# Altium PCB Y001_Artix7_USB3.0_D0.PcbDoc (part 1 of 2)
Units mil, origin at the board's own origin, x right, y up, seen from the top; angles counter-clockwise.
Board outline 4724.41 x 3149.61 mil, 8 copper layers (Top Layer, DGND, SIGNAL1, POWER, SIGNAL2, SIGNAL3, VCC3V3, Bottom Layer); 323 components, 271 nets, 1472 pads, 570 vias.
Unrouted connection lines stored in the file: 778.
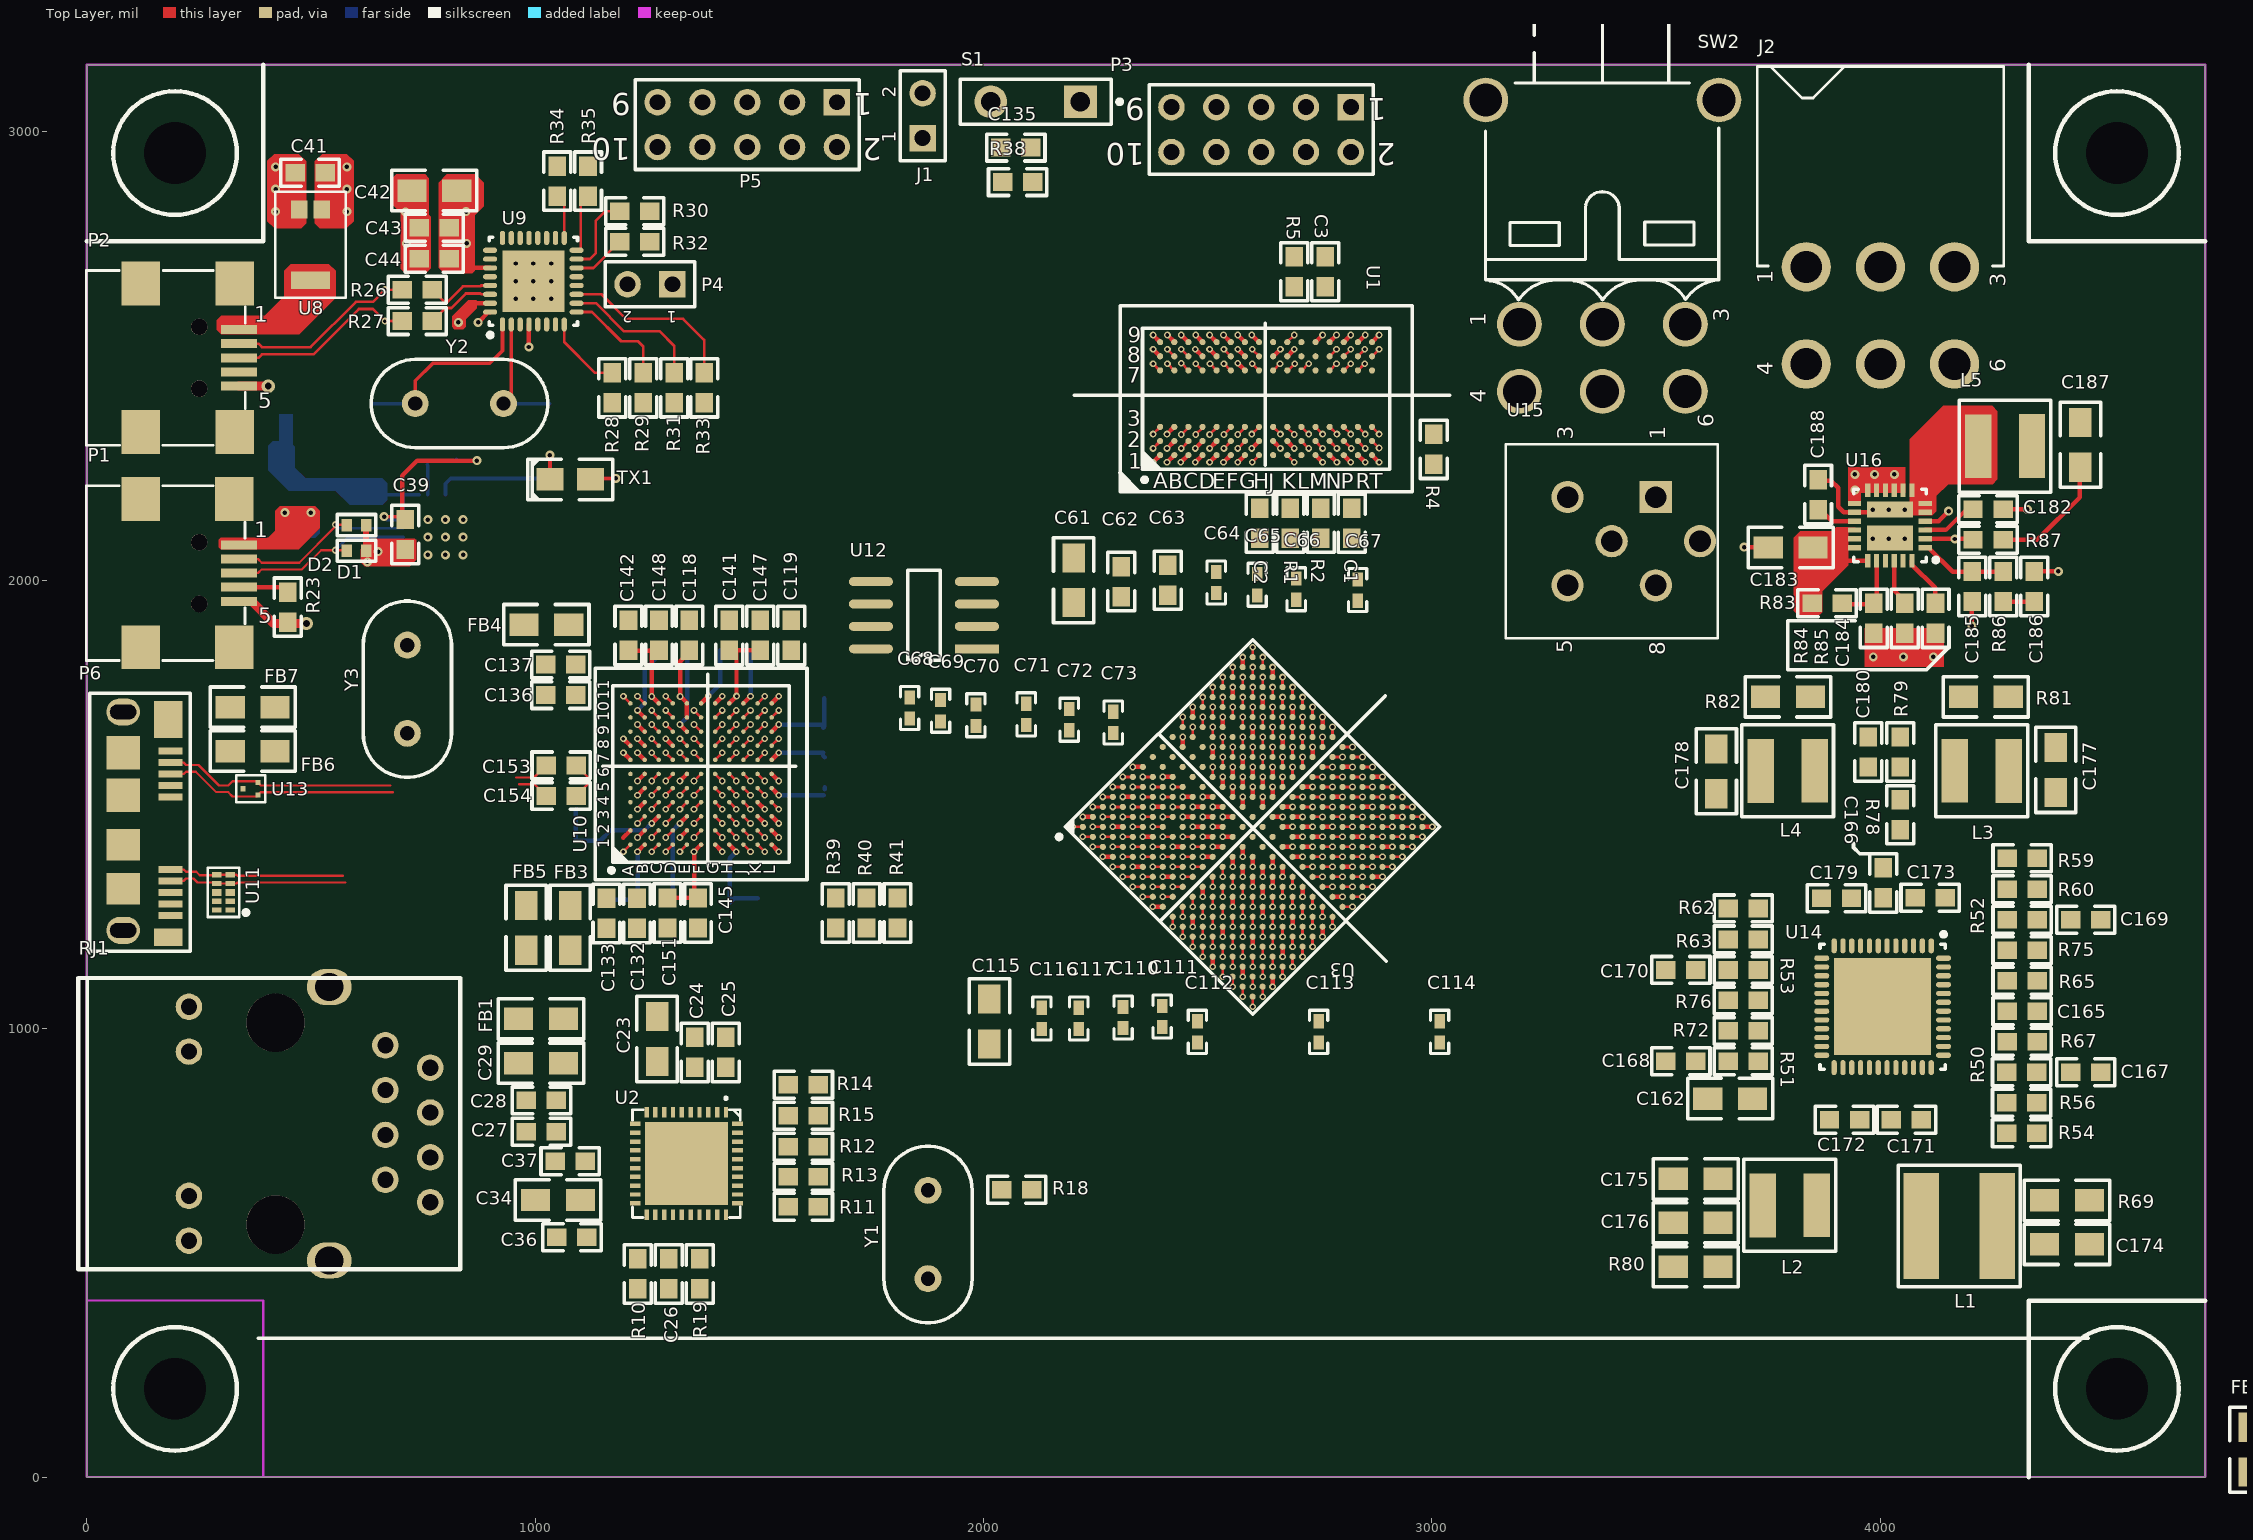
[diagram p0: Top Layer view]
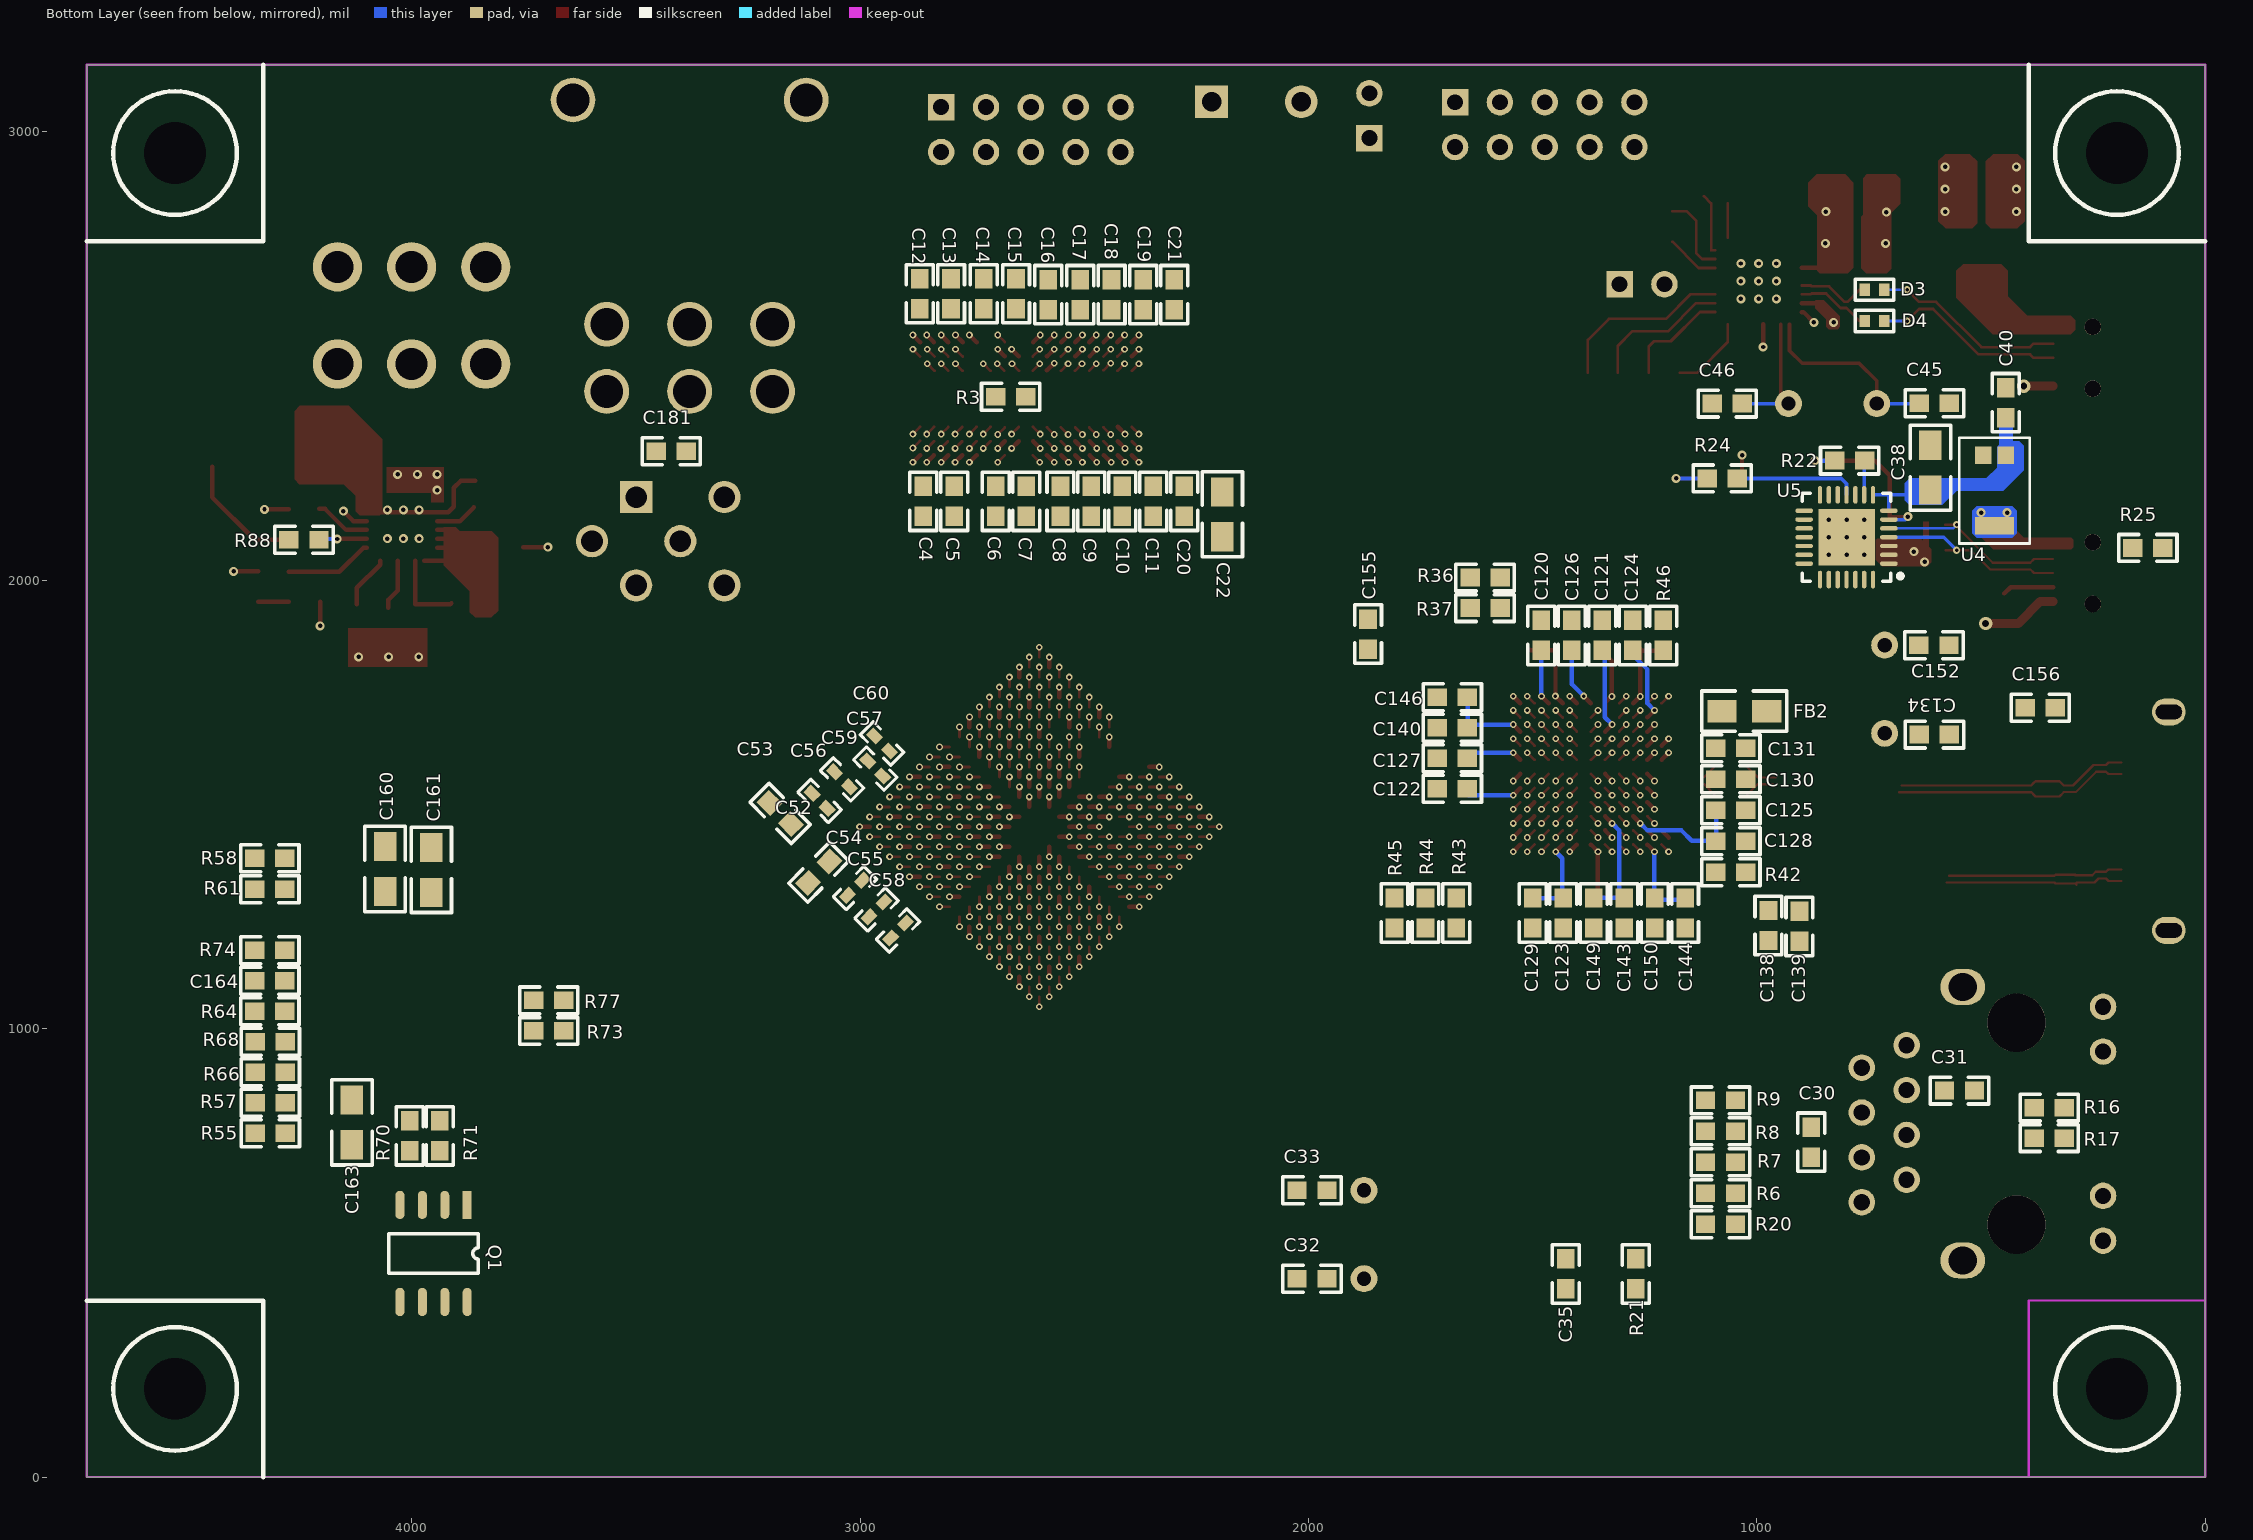
[diagram p1: Bottom Layer view, seen from below]
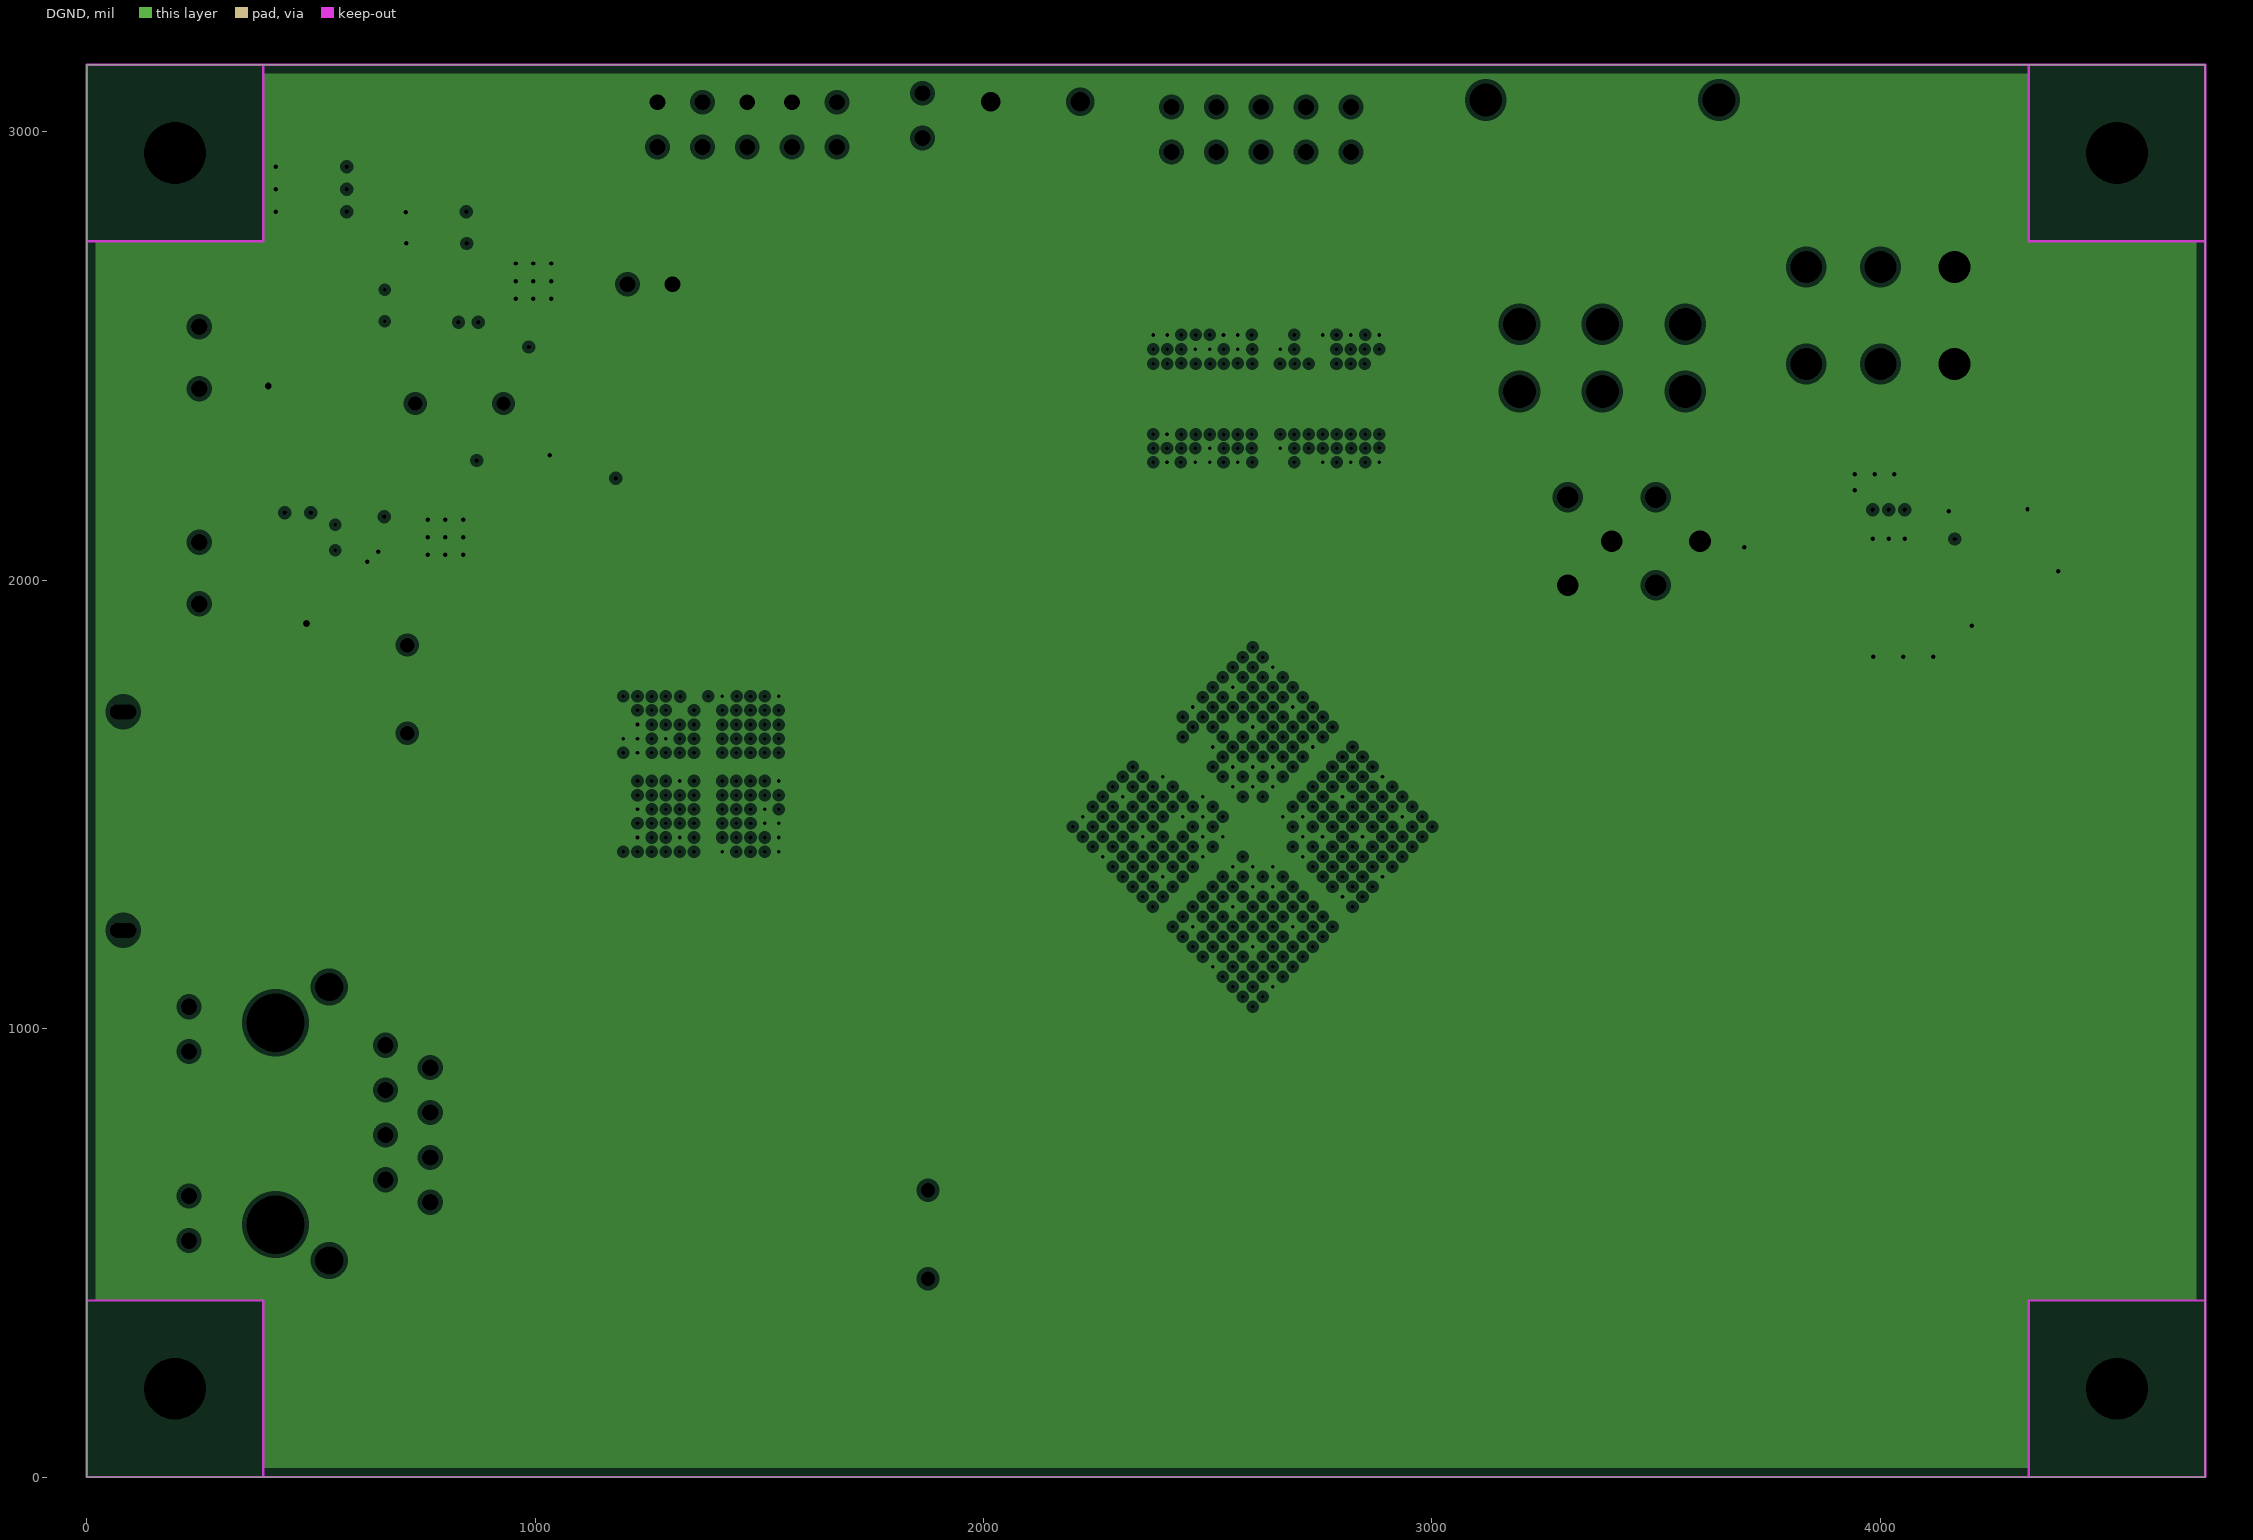
[diagram p2: DGND, clearances drawn from the general rule]
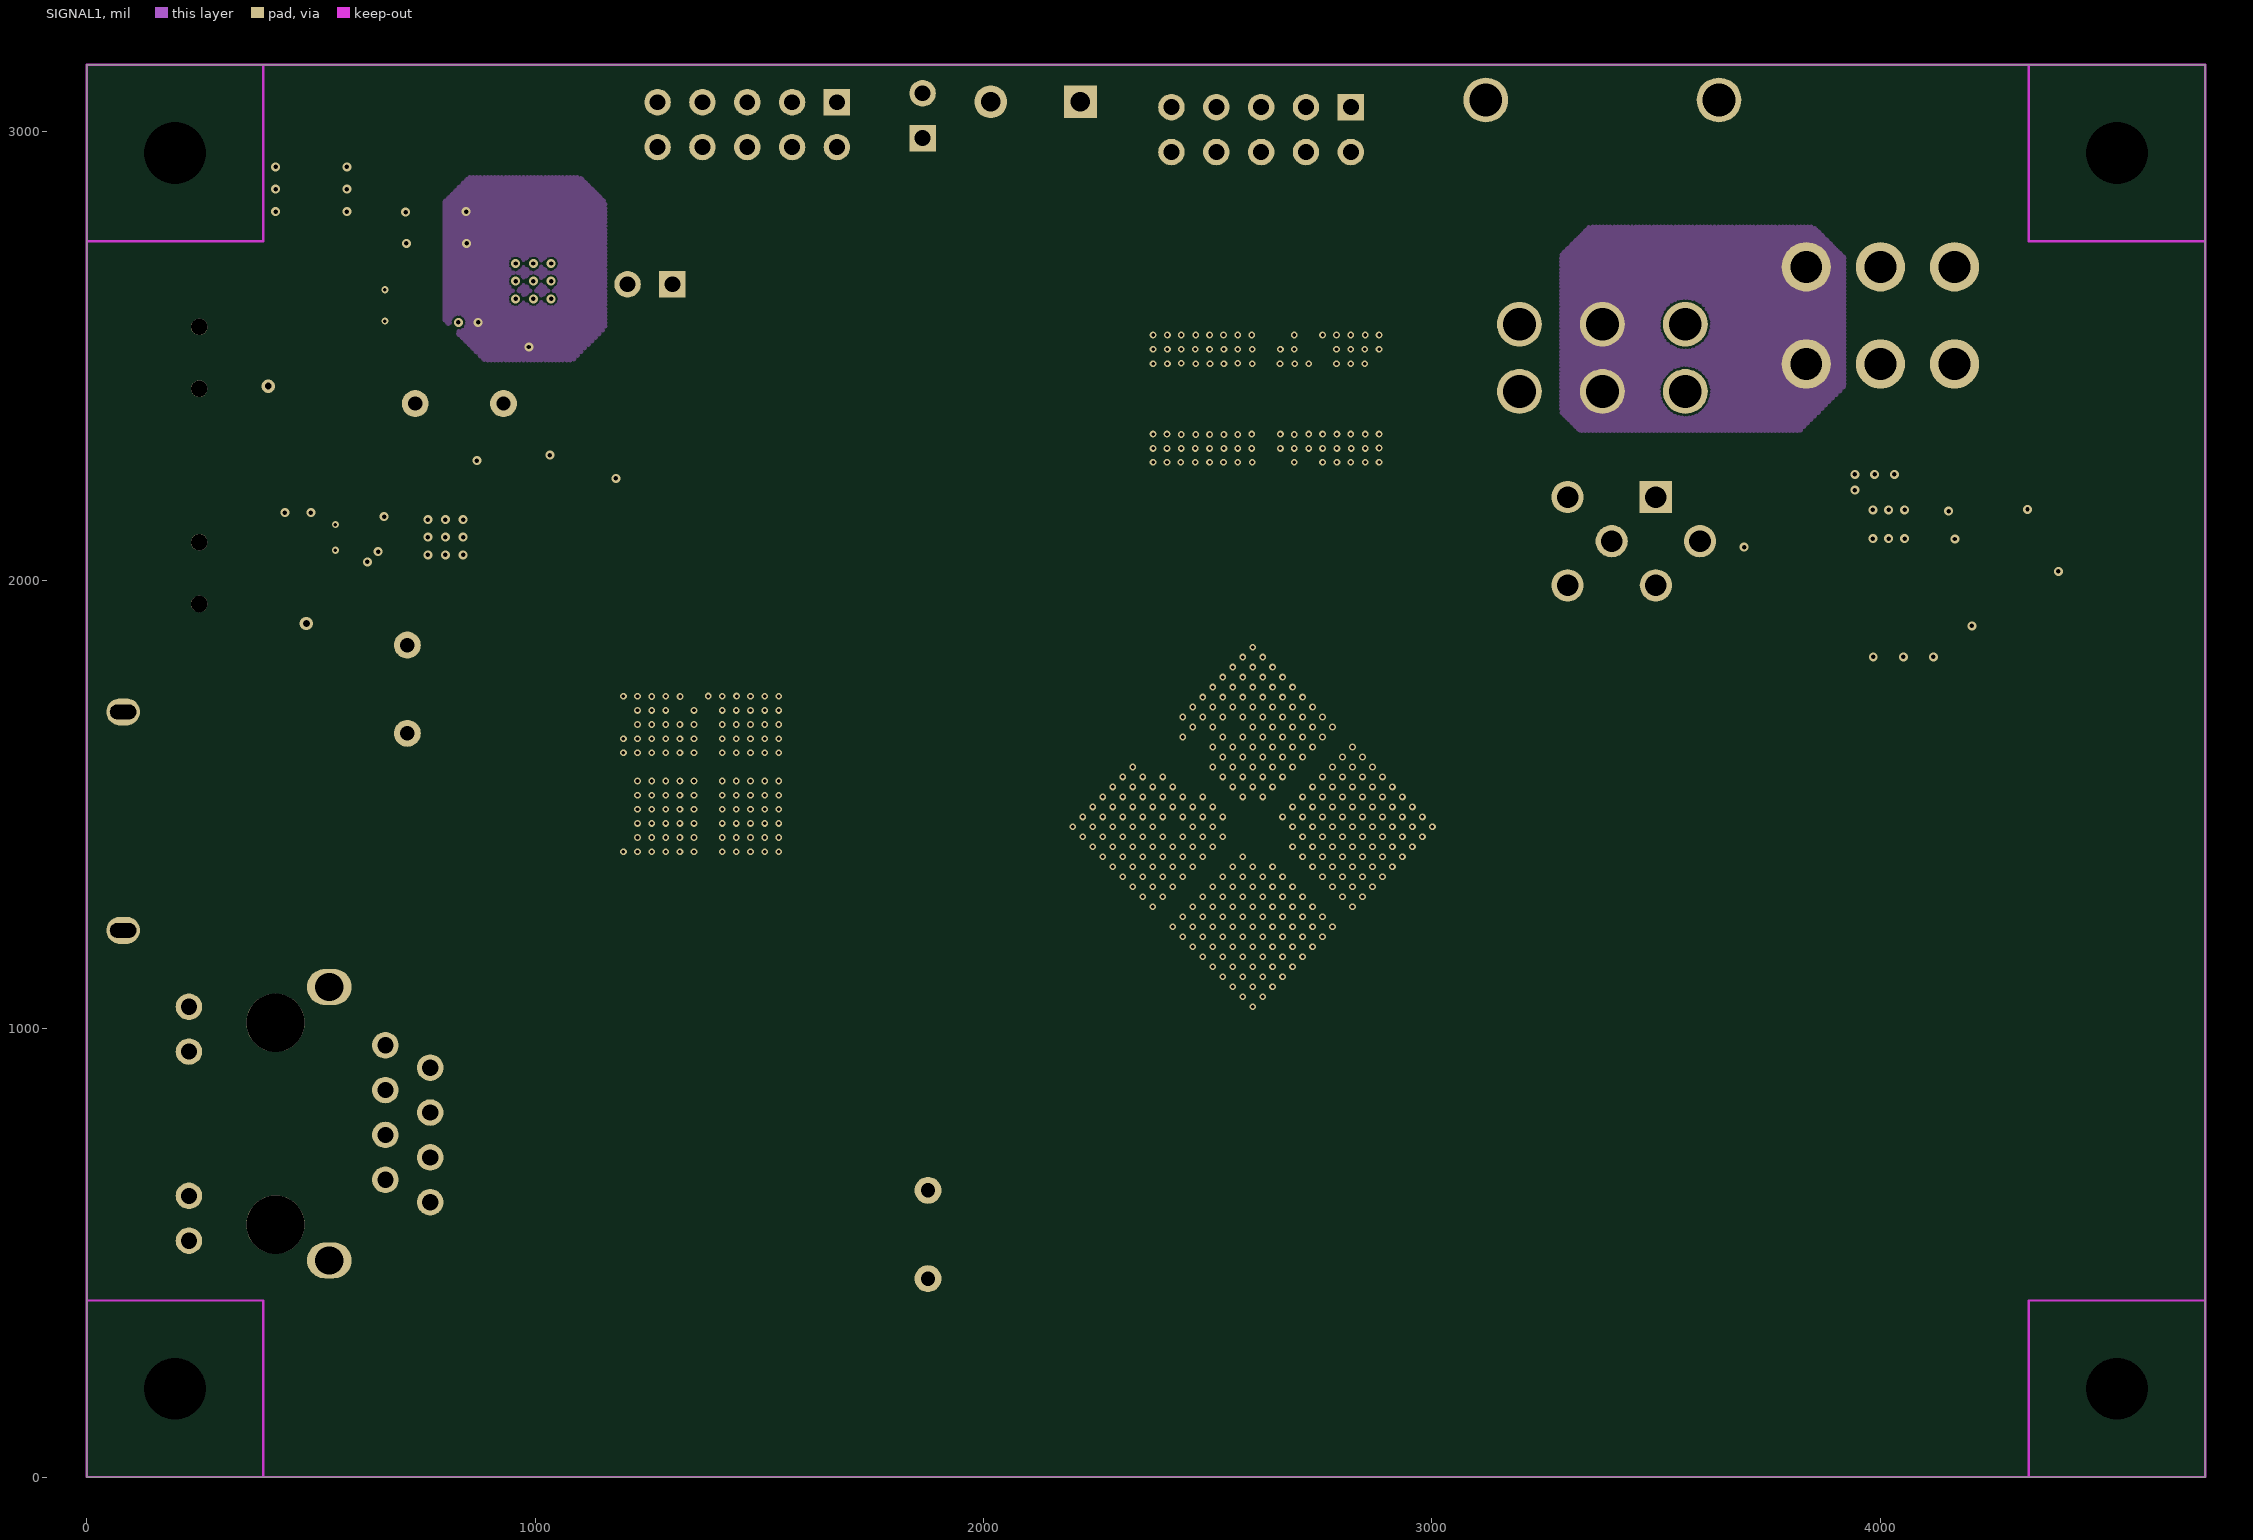
[diagram p3: SIGNAL1]
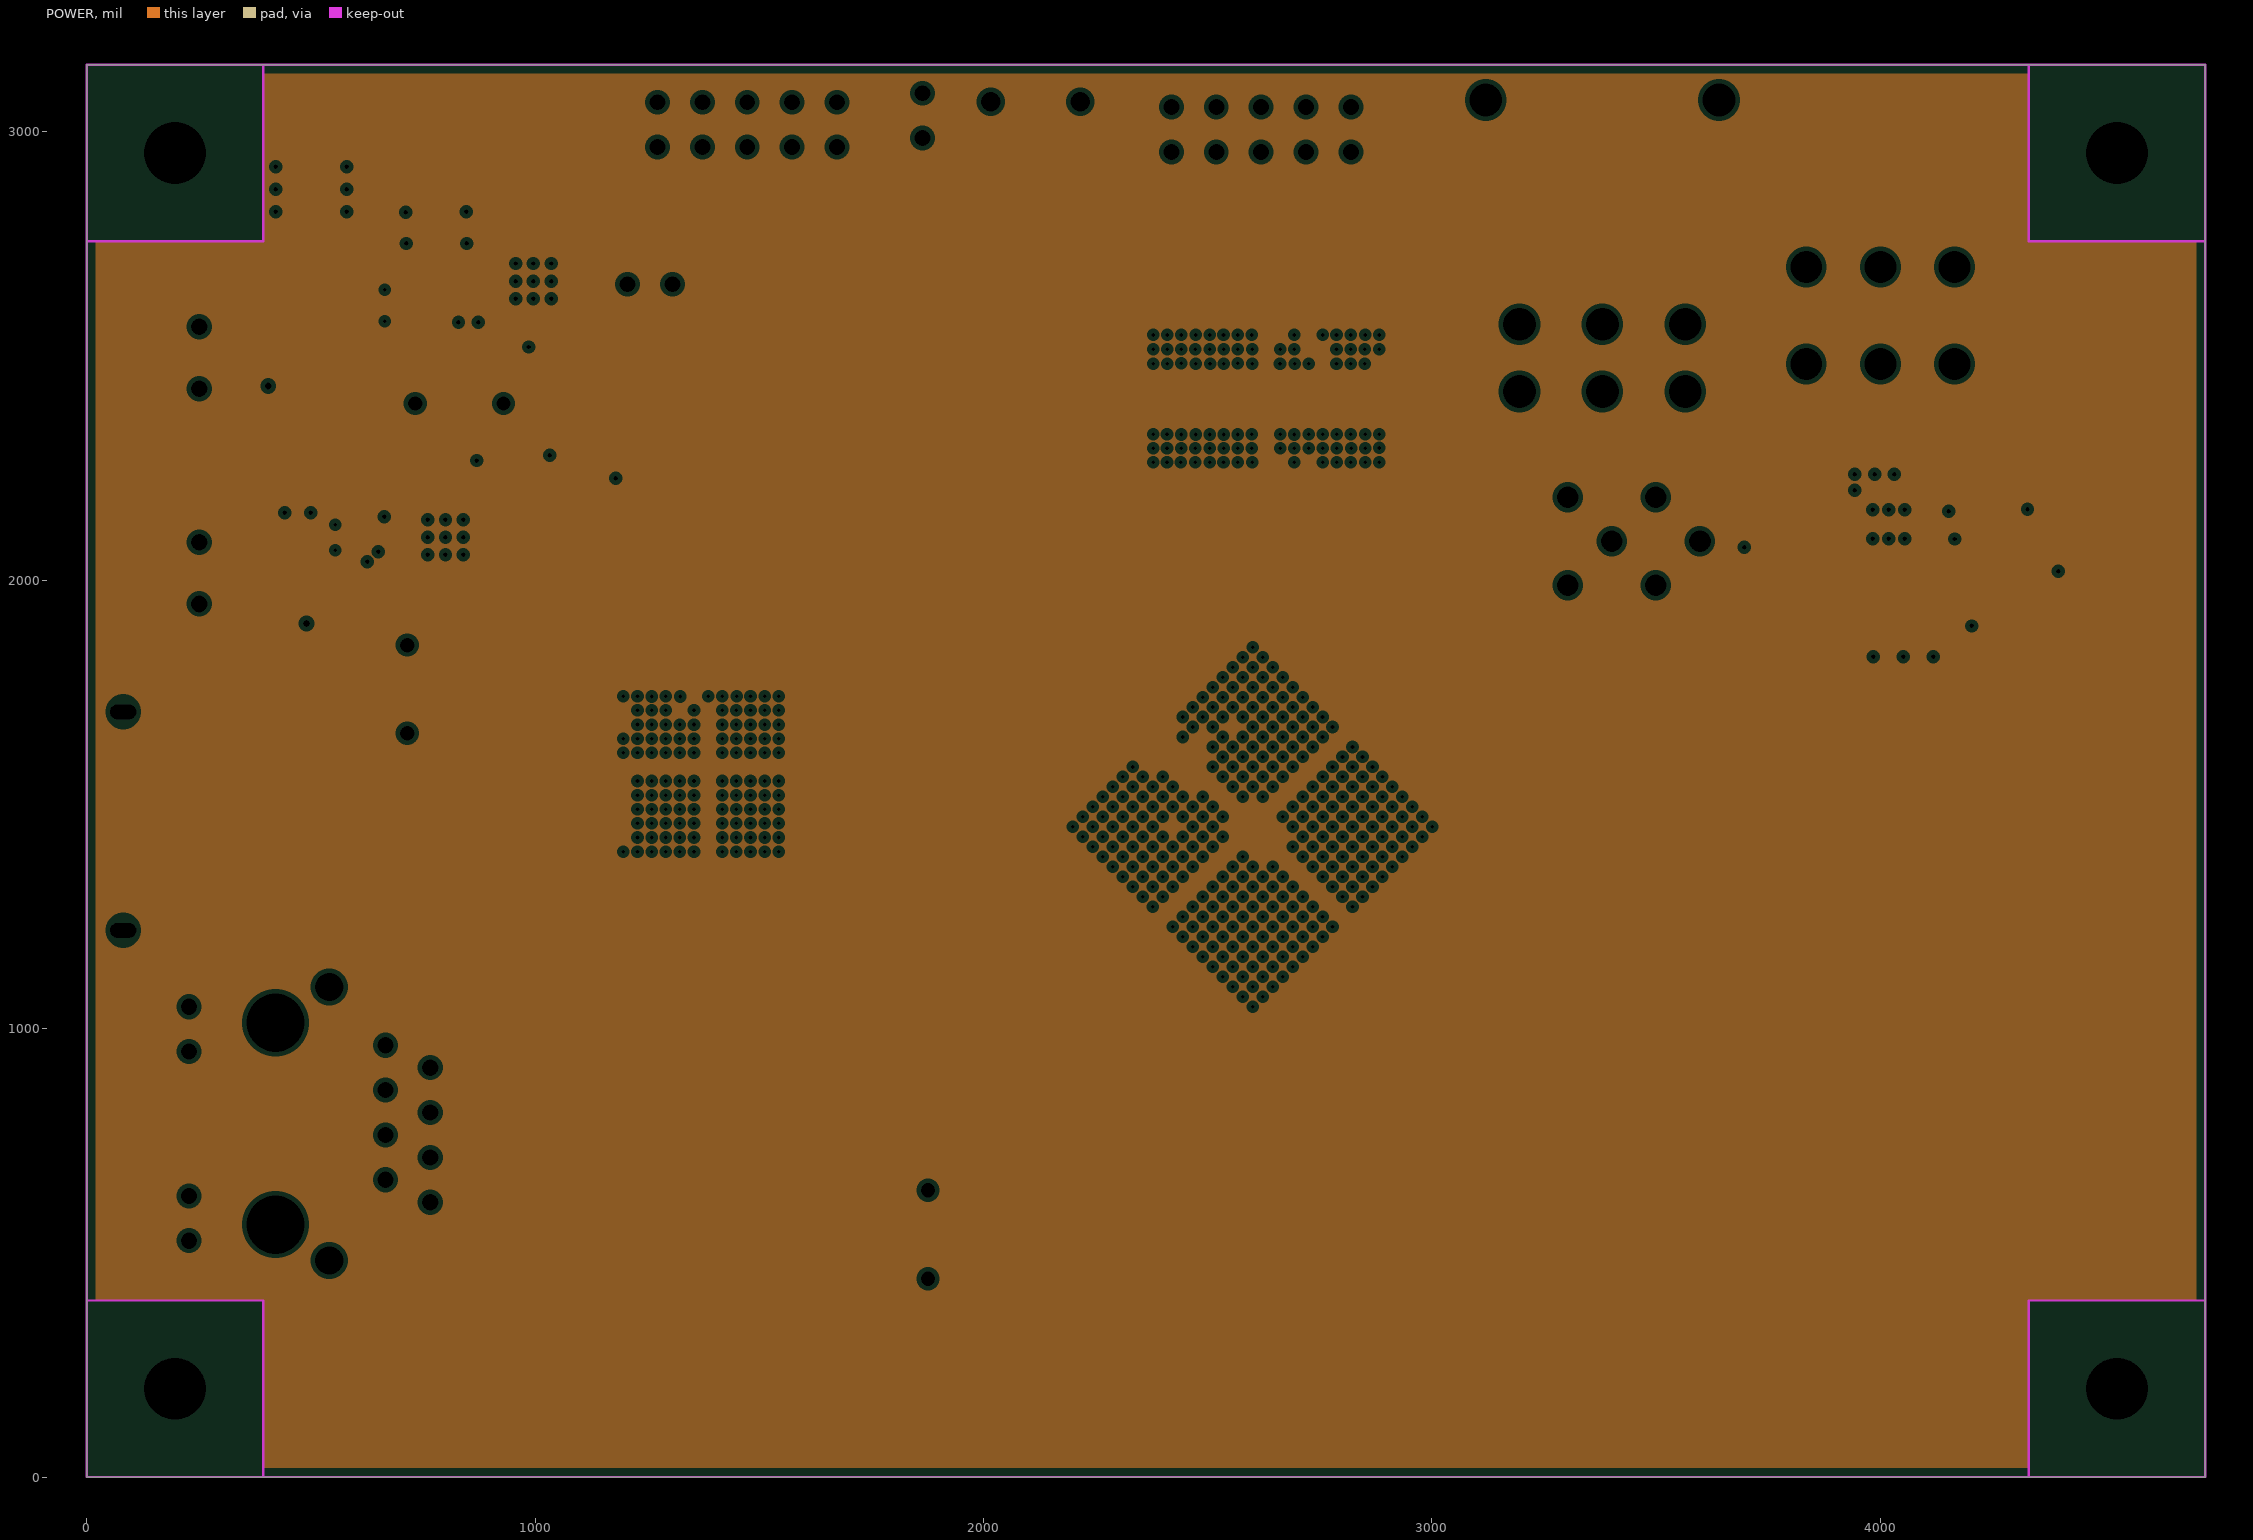
[diagram p4: POWER, clearances drawn from the general rule]
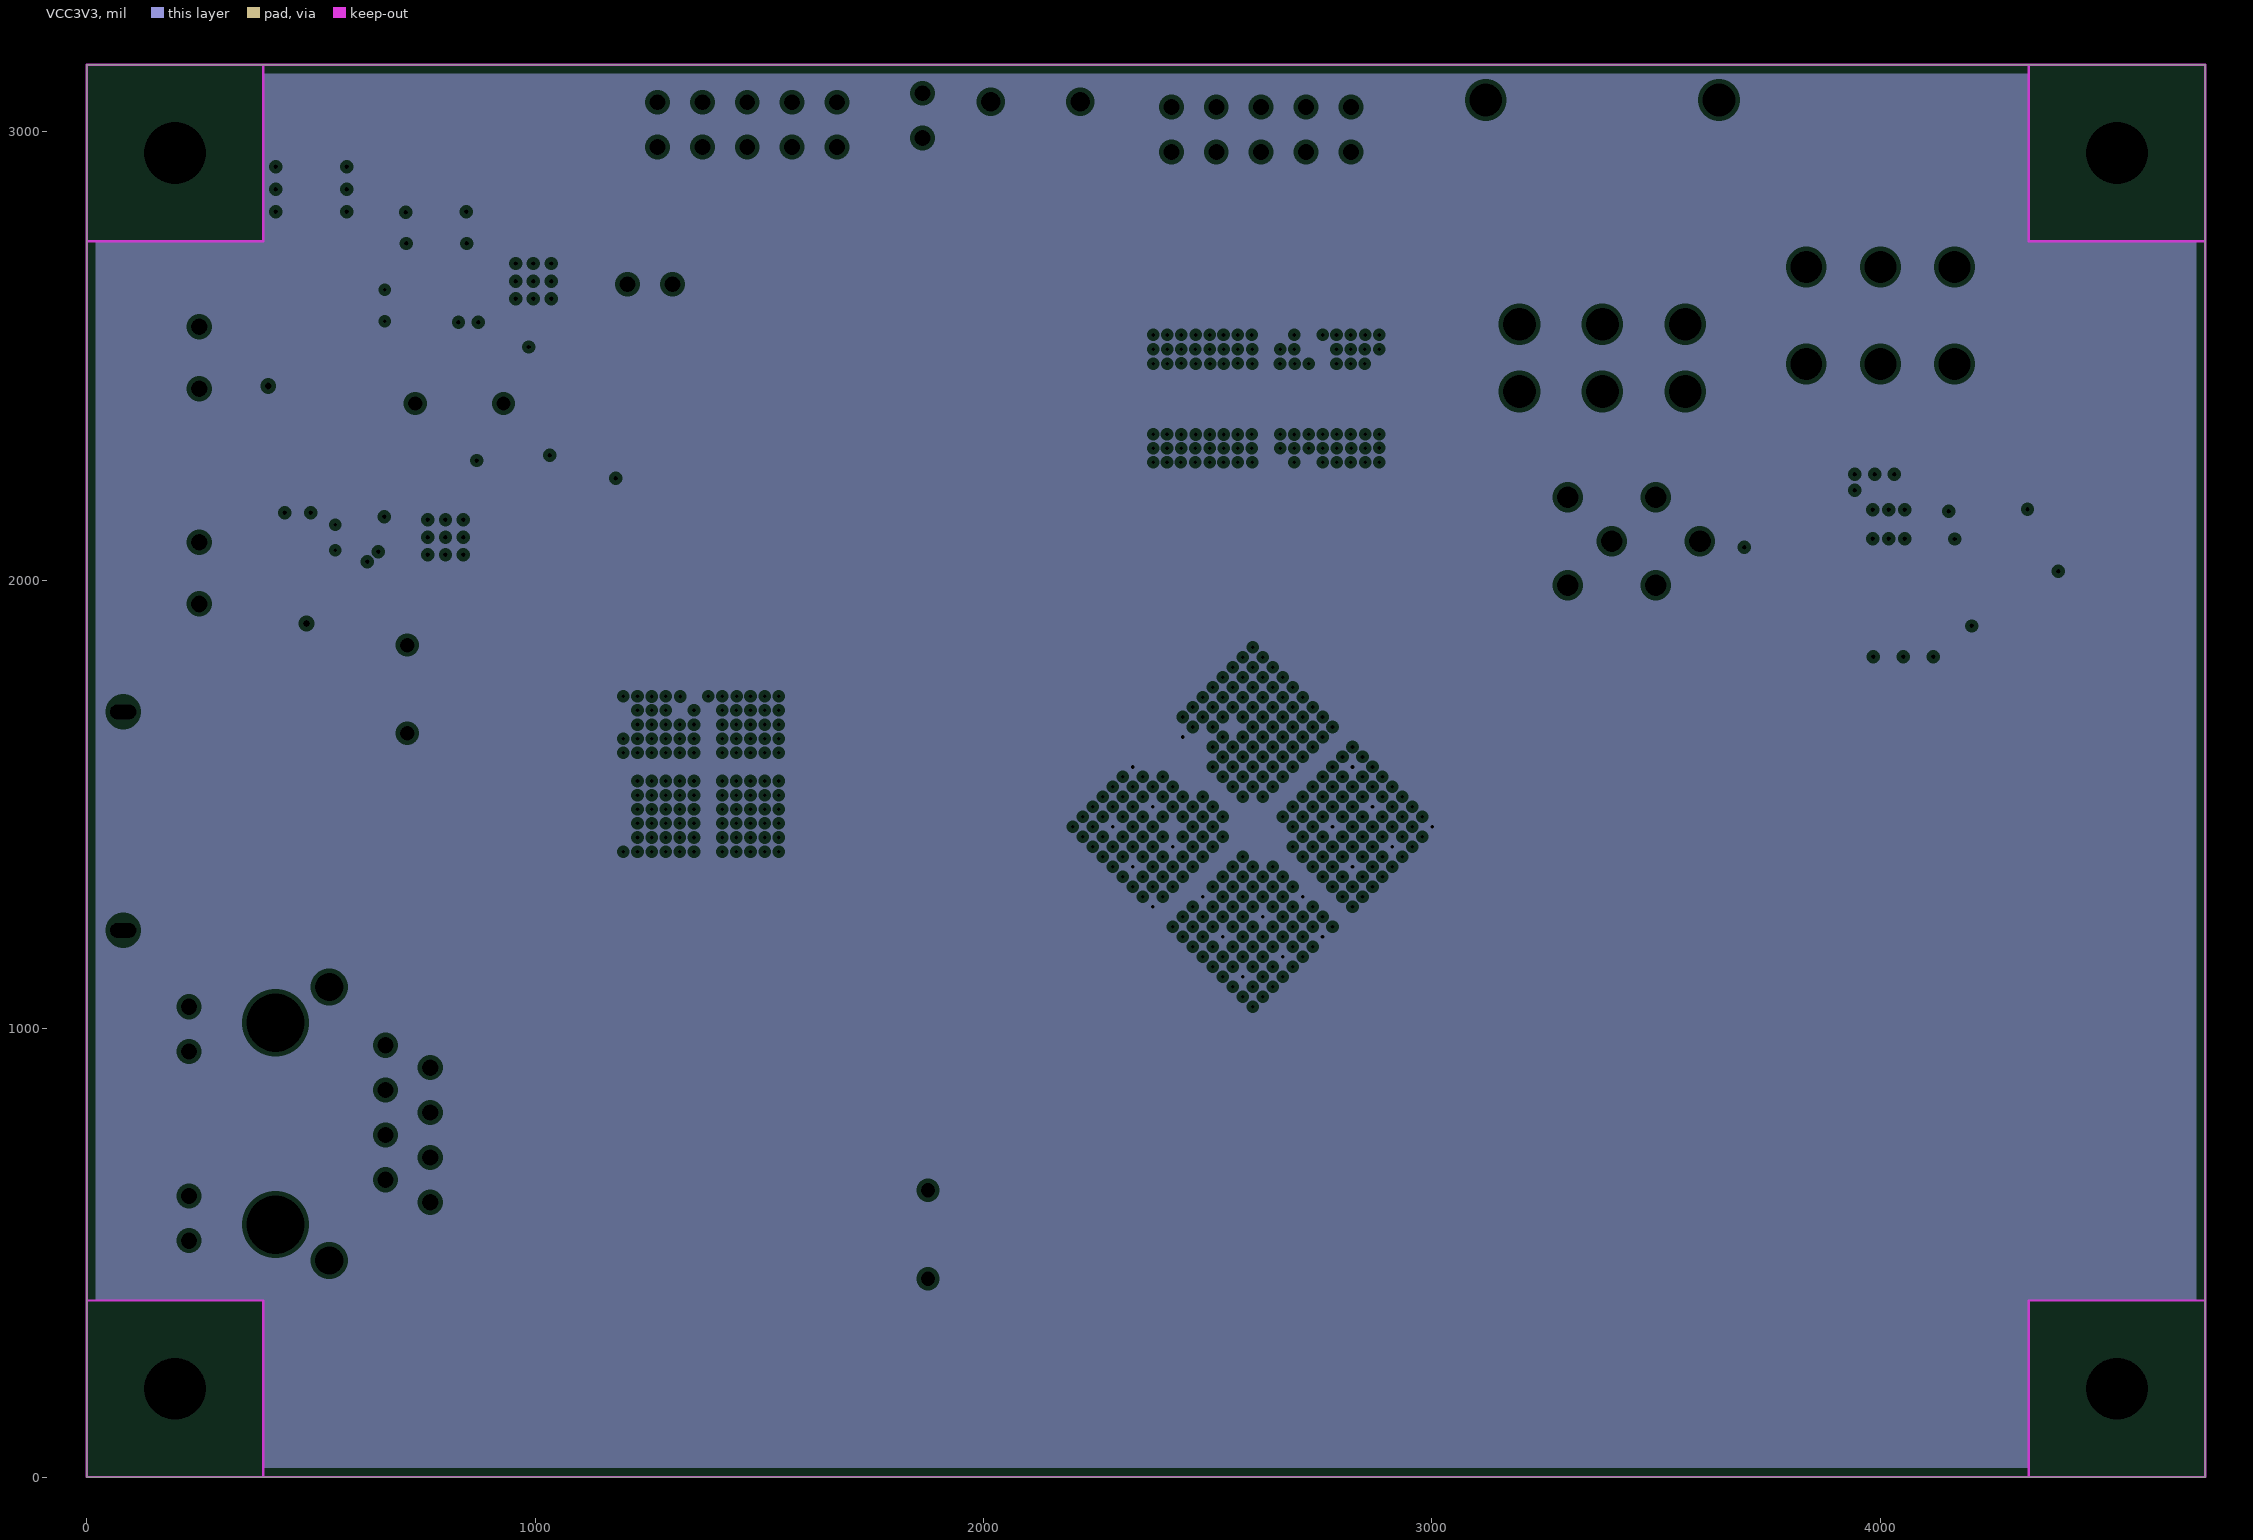
[diagram p5: VCC3V3, clearances drawn from the general rule]

## Layer stack, top to bottom
Top Solder: solder mask 0.4, Solder Resist, Dk 3.5
Top Layer: signal copper 1.4
Dielectric1: core 12.6, FR-4, Dk 4.8
DGND: plane copper 1.4
Dielectric5: prepreg 12.6, FR-4, Dk 4.8
SIGNAL1: signal copper 1.4
Dielectric2: core 12.6, FR-4, Dk 4.8
POWER: plane copper 1.4
Dielectric6: prepreg 12.6, FR-4, Dk 4.8
SIGNAL2: signal copper 1.4
Dielectric3: core 12.6, FR-4, Dk 4.8
SIGNAL3: signal copper 1.4
Dielectric4: prepreg 12.6, FR-4, Dk 4.8
VCC3V3: plane copper 1.4, net VCC3V3
Dielectric7: core 12.6, FR-4, Dk 4.8
Bottom Layer: signal copper 1.4
Bottom Solder: solder mask 0.4, Solder Resist, Dk 3.5

## Board outline
0,0 4724.41,0 4724.41,3149.61 0,3149.61

## Design rules (kind name [scope] priority, off if disabled: settings)
Clearance [All] p1: gap=2
ComponentClearance [All] p1: gap=0 collisioncheckmode=3 verticalgap=0 showdistances=FALSE
DiffPairsRouting [All] p1: maxlimit=10 minlimit=10 mostfreqgap=10 toplayer_minwidth=15 toplayer_maxwidth=15 toplayer_prefwidth=15 midlayer1_minwidth=15 midlayer1_maxwidth=15 midlayer1_prefwidth=15 midlayer2_minwidth=15 midlayer2_maxwidth=15 midlayer2_prefwidth=15 midlayer3_minwidth=15 midlayer3_maxwidth=15 midlayer3_prefwidth=15 bottomlayer_minwidth=15 bottomlayer_maxwidth=15 bottomlayer_prefwidth=15 maxuncoupledlength=500
HoleToHoleClearance [All] p1: gap=1 allowstackedmicrovias=TRUE
MinimumSolderMaskSliver [All] p1: minsoldermaskwidth=0
PlaneClearance [All] p1: clearance=10
PlaneConnect [All] p1: planeconnectstyle=Relief reliefexpansion=20 reliefentries=4 reliefconductorwidth=10 reliefairgap=10
PolygonConnect [All] p1: connectstyle=Direct reliefconductorwidth=10 reliefentries=4 polygonreliefangle="90 Angle" airgapwidth=10
RoutingCorners [All] p1: cornerstyle=45-Degree minsetback=10 maxsetback=400
RoutingVias [All] p1: holewidth=8 width=15 viastyle="Through Hole" minholewidth=6 minwidth=8 maxholewidth=40 maxwidth=80
SilkToSilkClearance [All] p1: silktosilkclearance=0
SilkToSolderMaskClearance SilkscreenOverComponentPads [IsPad] p1: minsilkscreentomaskgap=0 clearancetoexposedcopper=TRUE
SolderMaskExpansion [All] p1: expansion=2
Width [All] p1: maxlimit=50 minlimit=4 preferedwidth=10
21 further rules are at their usual default settings.

## Classes and differential pairs
component class POWER: C160 C161 C162 C163 C164 C165 C166 C167 C168 C169 C170 C171 C172 C173 C174 C175 C176 C177 C178 C179 C180 L1 L2 L3 L4 Q1 R50 R51 R52 R53 R54 R55 R56 R57 R58 R59 R60 R61 R62 R63 R64 R65 R66 R67 R68 R69 R70 R71 R72 R73 R74 R75 R76 R77 R78 R79 R80 R81 R82 U14
net class DDR3_DQ[15..0]: DDR3_DQ0 DDR3_DQ1 DDR3_DQ2 DDR3_DQ3 DDR3_DQ4 DDR3_DQ5 DDR3_DQ6 DDR3_DQ7 DDR3_DQ8 DDR3_DQ9 DDR3_DQ10 DDR3_DQ11 DDR3_DQ12 DDR3_DQ13 DDR3_DQ14 DDR3_DQ15
net class DDR3_A[13..0]: DDR3_A0 DDR3_A1 DDR3_A2 DDR3_A3 DDR3_A4 DDR3_A5 DDR3_A6 DDR3_A7 DDR3_A8 DDR3_A9 DDR3_A10 DDR3_A11 DDR3_A12 DDR3_A13
component class USB3.0: C118 C119 C120 C121 C122 C123 C124 C125 C126 C127 C128 C129 C130 C131 C132 C133 C134 C135 C136 C137 C138 C139 C140 C141 C142 C143 C144 C145 C146 C147 C148 C149 C150 C151 C152 C153 C154 C155 C156 C? FB2 FB3 FB4 FB5 FB6 FB7 J1 P5 P6 P7 P8 R36 R37 R38 R39 R40 R41 R42 R43 R44 R45 R46 R? S1 S? U10 U11 U12 U13 U? Y3 Y5
component class FPGA_Bank_3: C47 C48 C49 C50 C51 C52 C53 C54 C55 C56 C57 C58 C59 C60 C61 C62 C63 C64 C65 C66 C67 C68 C69 C70 C71 C72 C73 C74 C75 C76 C77 C78 C79 C80 C81 C82 C83 C84 C85 C86 C87 C88 C89 C90 C91 C92 C93 C94 C95 C96 C97 C98 C99 C100 C101 C102 C103 C104 C105 C106 C107 C108 C109 C110 C111 C112 C113 C114 C115 C116 C117 C?
component class FPGA_Bank_1: * C38 C39 C40 C? D1 D2 P1 R22 R23 R24 R25 R? TX TX1 U4 U5
component class "FPGA_10_100 Ethernet PHY": C23 C24 C25 C26 C27 C28 C29 C30 C31 C32 C33 C34 C35 C36 C37 C? FB1 R6 R7 R8 R9 R10 R11 R12 R13 R14 R15 R16 R17 R18 R19 R20 R21 R? RJ1 RJ45 U2 Y1
component class DDR3: C1 C2 C3 C4 C5 C6 C7 C8 C9 C10 C11 C12 C13 C14 C15 C16 C17 C18 C19 C20 C21 C22 C? R1 R2 R3 R4 R5 R? U1
component class FPGA_Bank_2: C41 C42 C43 C44 C45 C46 C? D3 D4 P2 P3 P4 P? R26 R27 R28 R29 R30 R31 R32 R33 R34 R35 R? U3 U6 U7 U8 U9 U? Y2
net class CTL[12..0]: CTL0 CTL1 CTL2 CTL3 CTL4 CTL5 CTL6 CTL7 CTL8 CTL9 CTL10 CTL11 CTL12
net class DQ[31..0]: DQ0 DQ1 DQ2 DQ3 DQ4 DQ5 DQ6 DQ7 DQ8 DQ9 DQ10 DQ11 DQ12 DQ13 DQ14 DQ15 DQ16 DQ17 DQ18 DQ19 DQ20 DQ21 DQ22 DQ23 DQ24 DQ25 DQ26 DQ27 DQ28 DQ29 DQ30 DQ31
net class FX3_GPIO[57..50]: FX3_GPIO50 FX3_GPIO51 FX3_GPIO52 FX3_GPIO53 FX3_GPIO54 FX3_GPIO55 FX3_GPIO56 FX3_GPIO57
component class POWER2: C181 C182 C183 C184 C185 C186 C187 C188 C189 C190 FB8 FB9 J2 L5 R83 R84 R85 R86 R87 R88 SW2 U15 U16
differential pair DDR3_DQS1: +DDR3_DQS1_P -DDR3_DQS1_N
differential pair DDR3_DQS0: +DDR3_DQS0_P -DDR3_DQS0_N
differential pair USBB: +USBB_P -USBB_N
differential pair USBA: +USBA_P -USBA_N
differential pair USBA1: +USBA1_P -USBA1_N
differential pair TX: +TX_P -TX_N
differential pair RX: +RX_P -RX_N
differential pair DDR3_CLK0: +DDR3_CLK0_P -DDR3_CLK0_N
differential pair USB_D: +USB_D_P -USB_D_N
differential pair USB_PRECAPTX: +USB_PRECAPTX_P -USB_PRECAPTX_N
differential pair USB_SSRX: +USB_SSRX_P -USB_SSRX_N
differential pair USB_SSTX: +USB_SSTX_P -USB_SSTX_N

## Components (designator, comment, footprint, x,y, rotation, side; value= is the part's Value field where it differs from the comment)
C1 "10nF" 1608[0603] 2821,2127 r90 top
C2 "1.0uF" 1608[0603] 2616,2127 r270 top
C3 "10nF" 1608[0603] 2762,2688 r90 top
C4 "47nF" 1608[0603] 2859,2176 r270 bottom
C5 "47nF" 1608[0603] 2790,2176 r270 bottom
C6 "47nF" 1608[0603] 2697,2176 r270 bottom
C7 "47nF" 1608[0603] 2629,2176 r270 bottom
C8 "47nF" 1608[0603] 2553,2176 r270 bottom
C9 "47nF" 1608[0603] 2484,2176 r270 bottom
C10 "47nF" 1608[0603] 2415,2176 r270 bottom
C11 "47nF" 1608[0603] 2346,2176 r270 bottom
C12 "47nF" 1608[0603] 2867,2639 r90 bottom
C13 "47nF" 1608[0603] 2797,2639 r90 bottom
C14 "47nF" 1608[0603] 2724,2639 r90 bottom
C15 "47nF" 1608[0603] 2652,2639 r90 bottom
C16 "47nF" 1608[0603] 2580,2637 r90 bottom
C17 "47nF" 1608[0603] 2509,2637 r90 bottom
C18 "47nF" 1608[0603] 2439,2637 r90 bottom
C19 "47nF" 1608[0603] 2368,2637 r90 bottom
C20 "470nF" 1608[0603] 2277,2176 r270 bottom
C21 "470nF" 1608[0603] 2299,2637 r90 bottom
C22 "4.7uF" 2012[0805] 2192,2147 r270 bottom
C23 "10uF" 2012[0805] 1272,977 r90 top
C24 "1uF" 1608[0603] 1356,947 r90 top
C25 "100nF" 1608[0603] 1425,947 r90 top
C26 "100nF" 1608[0603] 1298,453 r270 top
C27 "100nF" 1608[0603] 1014,770 r180 top
C28 "1uF" 1608[0603] 1014,840 r180 top
C29 "10uF" 2012[0805] 1013,923 r180 top
C30 "100nF" 1608[0603] 879,747 r90 bottom
C31 "100nF" 1608[0603] 548,862 r180 bottom
C32 "27pF" 1608[0603] 1992,442 r0 bottom
C33 "27pF" 1608[0603] 1992,640 r0 bottom
C34 "10uF" 2012[0805] 1051,618 r180 top
C35 "0.1uF" 1608[0603] 1426,453 r270 bottom
C36 "0.1uF" 1608[0603] 1082,535 r180 top
C37 "0.1uF" 1608[0603] 1078,704 r180 top
C38 "4.7uF" 2012[0805] 613,2251 r90 bottom
C39 "0.22uF" 1608[0603] 710,2102 r270 top
C40 "0.22uF" 1608[0603] 445,2396 r90 bottom
C41 "0.22uF" 1608[0603] 498,2909 r180 top locked
C42 "4.7uF" 2012[0805] 775,2869 r180 top
C43 "0.22uF" 1608[0603] 775,2786 r180 top
C44 "0.22uF" 1608[0603] 775,2717 r180 top
C45 "15pF" 1608[0603] 604,2395 r180 bottom
C46 "15pF" 1608[0603] 1066,2394 r0 bottom
C47 "47uF" 2012[0805] 6709,4345 r0 top
C48 "470nF" 0402 6894,4345 r90 top
C49 "4.7uF" 1608[0603] 7134,4312 r90 top
C50 "470nF" 0402 7359,4345 r90 top
C51 "47nF" 0402 7624,4375 r0 top
C52 "4.7uF" 1608[0603] 3092,1349 r315 bottom
C53 "4.7uF" 1608[0603] 3178,1480 r45 bottom
C54 "470nF" 0402 3011,1314 r315 bottom
C55 "470nF" 0402 2963,1266 r315 bottom
C56 "470nF" 0402 3090,1508 r45 bottom
C57 "470nF" 0402 2966,1580 r45 bottom
C58 "47nF" 0402 2915,1219 r315 bottom
C59 "47nF" 0402 3040,1556 r45 bottom
C60 "47nF" 0402 2951,1636 r45 bottom
C61 "100uF" 2012[0805] 2201,2000 r90 top
C62 "4.7uF" 1608[0603] 2307,1997 r90 top
C63 "4.7uF" 1608[0603] 2411,2000 r90 top
C64 "470nF" 0402 2519,1995 r90 top
C65 "470nF" 0402 2610,1990 r90 top
C66 "470nF" 0402 2697,1980 r90 top
C67 "470nF" 0402 2834,1978 r90 top
C68 "47nF" 0402 1835,1715 r90 top
C69 "47nF" 0402 1904,1709 r90 top
C70 "47nF" 0402 1983,1699 r90 top
C71 "10nF" 0402 2095,1701 r90 top
C72 "10nF" 0402 2191,1689 r90 top
C73 "10nF" 0402 2289,1683 r90 top
C74 "100uF" 2012[0805] 6331,3907 r90 top
C75 "4.7uF" 1608[0603] 6561,3907 r90 top
C76 "470nF" 0402 6791,3907 r90 top
C77 "470nF" 0402 7006,3937 r90 top
C78 "470nF" 0402 7236,3937 r90 top
C79 "470nF" 0402 7466,3937 r90 top
C80 "47nF" 0402 7696,3937 r90 top
C81 "47nF" 0402 7966,3967 r0 top
C82 "47nF" 0402 8141,3937 r90 top
C83 "4.7uF" 1608[0603] 8371,3937 r90 top
C84 "4.7uF" 1608[0603] 8616,3907 r90 top
C85 "4.7uF" 1608[0603] 8846,3907 r90 top
C86 "470nF" 0402 9061,3937 r90 top
C87 "470nF" 0402 249,4345 r90 top
C88 "470nF" 0402 479,4345 r90 top
C89 "470nF" 0402 709,4345 r90 top
C90 "47nF" 0402 939,4345 r90 top
C91 "47nF" 0402 1204,4375 r0 top
C92 "47nF" 0402 1379,4345 r90 top
C93 "10nF" 0402 5856,3937 r90 top
C94 "100nF" 0402 6086,3937 r90 top
C95 "100uF" 2012[0805] 4181,3907 r90 top
C96 "4.7uF" 1608[0603] 4411,3907 r90 top
C97 "4.7uF" 1608[0603] 4641,3907 r90 top
C98 "470nF" 0402 4856,3937 r90 top
C99 "470nF" 0402 5086,3937 r90 top
C100 "47nF" 0402 5316,3937 r90 top
C101 "47nF" 0402 5596,3937 r90 top
C102 "47uF" 2012[0805] 1991,3937 r0 top
C103 "4.7uF" 1608[0603] 2216,3907 r90 top
C104 "4.7uF" 1608[0603] 2496,3907 r90 top
C105 "470nF" 0402 2761,3937 r90 top
C106 "470nF" 0402 3041,3937 r90 top
C107 "470nF" 0402 3321,3937 r90 top
C108 "470nF" 0402 3606,3937 r90 top
C109 "47nF" 1608[0603] 3886,3937 r90 top
C110 "47nF" 0402 2311,1025 r90 top
C111 "47nF" 0402 2398,1027 r90 top
C112 "47nF" 0402 2477,993 r90 top
C113 "47nF" 0402 2747,993 r90 top
C114 "47nF" 0402 3017,993 r90 top
C115 "47uF" 2012[0805] 2013,1016 r90 top
C116 "470nF" 0402 2130,1023 r90 top
C117 "47nF" 0402 2212,1023 r90 top
C118 "0.1uF" 1608[0603] 1344,1877 r90 top
C119 "0.1uF" 1608[0603] 1571,1877 r90 top
C120 "0.1uF" 1608[0603] 1481,1877 r90 bottom
C121 "0.1uF" 1608[0603] 1345,1877 r90 bottom
C122 "0.1uF" 1608[0603] 1679,1535 r0 bottom
C123 "0.1uF" 1608[0603] 1432,1258 r270 bottom
C124 "0.1uF" 1608[0603] 1277,1877 r90 bottom
C125 "0.1uF" 1608[0603] 1058,1487 r180 bottom
C126 "0.01uF" 1608[0603] 1413,1877 r90 bottom
C127 "0.01uF" 1608[0603] 1679,1603 r0 bottom
C128 "0.01uF" 1608[0603] 1058,1418 r180 bottom
C129 "0.01uF" 1608[0603] 1500,1258 r270 bottom
C130 "2.2uF" 1608[0603] 1058,1556 r180 bottom
C131 "0.1uF" 1608[0603] 1058,1625 r180 bottom
C132 "2.2uF" 1608[0603] 1227,1257 r270 top
C133 "0.1uF" 1608[0603] 1159,1257 r270 top
C134 "12pF" 1608[0603] 604,1656 r180 bottom
C135 "100nF" 1608[0603] 2072,2965 r180 top
C136 "2.2uF" 1608[0603] 1057,1744 r180 top
C137 "0.1uF" 1608[0603] 1057,1812 r180 top
C138 "2.2uF" 1608[0603] 974,1230 r270 bottom
C139 "0.1uF" 1608[0603] 905,1228 r270 bottom
C140 "0.1uF" 1608[0603] 1679,1671 r0 bottom
C141 "0.1uF" 1608[0603] 1433,1877 r90 top
C142 "0.1uF" 1608[0603] 1208,1877 r90 top
C143 "0.1uF" 1608[0603] 1296,1258 r270 bottom
C144 "0.1uF" 1608[0603] 1160,1258 r270 bottom
C145 "0.1uF" 1608[0603] 1363,1258 r270 top
C146 "0.01uF" 1608[0603] 1679,1739 r0 bottom
C147 "0.01uF" 1608[0603] 1502,1877 r90 top
C148 "0.01uF" 1608[0603] 1276,1877 r90 top
C149 "0.01uF" 1608[0603] 1364,1258 r270 bottom
C150 "0.01uF" 1608[0603] 1228,1258 r270 bottom
C151 "0.01uF" 1608[0603] 1295,1258 r270 top
C152 "12pF" 1608[0603] 605,1855 r180 bottom
C153 "100nF" 1608[0603] 1058,1587 r0 top
C154 "100nF" 1608[0603] 1058,1519 r0 top
C155 "0.1uF" 1608[0603] 1867,1880 r90 bottom
C156 "100nF" 1608[0603] 368,1716 r180 bottom
C160 "10uF" 2012[0805] 4059,1356 r90 bottom
C161 "10uF" 2012[0805] 3956,1354 r90 bottom
C162 "10uF" 2012[0805] 3665,844 r180 top
C163 "10uF" 2012[0805] 4133,791 r270 bottom
C164 "1uF" 1608[0603] 4316,1107 r0 bottom
C165 "1uF" 1608[0603] 4316,1039 r0 top
C166 "1uF" 1608[0603] 4006,1325 r90 top
C167 "2.7nF" 1608[0603] 4458,903 r0 top
C168 "5.6nF" 1608[0603] 3555,927 r180 top
C169 "1.8nF" 1608[0603] 4458,1243 r0 top
C170 "1.8nF" 1608[0603] 3555,1131 r180 top
C171 "100nF" 1608[0603] 4058,797 r0 top
C172 "100nF" 1608[0603] 3920,797 r180 top
C173 "100nF" 1608[0603] 4111,1292 r180 top
C174 "100uF" 2012[0805] 4416,519 r180 top
C175 "22uF" 2012[0805] 3588,665 r180 top
C176 "22uF" 2012[0805] 3588,567 r180 top
C177 "10uF" 2012[0805] 4391,1577 r270 top
C178 "10uF" 2012[0805] 3634,1574 r270 top
C179 "100nF" 1608[0603] 3902,1291 r0 top
C180 "1uF" 1608[0603] 3973,1617 r90 top
C181 "1uF" 1608[0603] 3421,2288 r180 bottom
C182 "1uF" 1608[0603] 4240,2158 r0 top
C183 "10uF" 2012[0805] 3800,2073 r180 top
C184 "3.9pF" 1608[0603] 4123,1915 r90 top
C185 "3.9pF" 1608[0603] 4205,1986 r90 top
C186 "1.2nF" 1608[0603] 4343,1986 r270 top
C187 "4.7uF" 2012[0805] 4446,2302 r90 top
C188 "100nF" 1608[0603] 3861,2191 r90 top
C189 "1uF" 1608[0603] 5039,91 r90 top
C190 "470nF" 1608[0603] 5319,91 r90 top
D1 "PESD0402-140" PESD0402-140 580,2066 r0 top
D2 "PESD0402-140" PESD0402-140 580,2123 r0 top
D3 "PESD0402-140" PESD0402-140 716,2648 r0 bottom
D4 "PESD0402-140" PESD0402-140 716,2578 r0 bottom
FB1 "600Ohm/100MHz" 2012[0805] 1013,1022 r0 top
FB2 "1uH,250mA" 2012[0805] 1028,1708 r0 bottom
FB3 "1uH,250mA" 2012[0805] 1078,1225 r90 top
FB4 "1uH,250mA" 2012[0805] 1025,1901 r0 top
FB5 "1uH,250mA" 2012[0805] 980,1225 r90 top
FB6 "1uH,250mA" 2012[0805] 370,1619 r180 top locked
FB7 "1uH,250mA" 2012[0805] 370,1717 r180 top locked
FB8 "600Ohm/100MHz" 2012[0805] 5615,61 r90 top
FB9 "600Ohm/100MHz" 2012[0805] 4824,61 r90 top
J1 "DNP" DNP 1864,3036 r0 top
J2 "powerin" POWER2X3 4000,2734 r0 top locked
L1 "Inductor Iron" SRN6045 4176,560 r0 top
L2 "Inductor Iron" SRN4018 3798,606 r180 top
L3 "Inductor Iron" SRN4018 4226,1575 r0 top
L4 "Inductor Iron" SRN4018 3793,1575 r180 top
L5 "Inductor Iron" SRN4018 4278,2299 r0 top
P1 "USB(SLAVE)" USB_MINI_BTYPE 230,2016 r270 top locked
P2 "USB(SLAVE)" USB_MINI_BTYPE 230.17,2496 r270 top locked
P3 "Header 5X2" HDR2X5 2819,3055 r180 top
P4 "DNP" DNP 1256,2660 r90 top
P5 "Header 5X2" HDR2X5 1673,3066 r180 top
P6 "USB3.0" ZX360D-B-10P 134,1455 r270 top locked
P7 "DNP" DNP 5062,597 r0 top
Q1 "FDS9926A" FDS9926A 3876,607 r270 bottom locked
R1 "Res3" 1608[0603] 2684,2127 r270 top
R2 "Res3" 1608[0603] 2752,2127 r90 top
R3 "Res3" 1608[0603] 2664,2409 r0 bottom
R4 "Res3" 1608[0603] 3004,2292 r270 top
R5 "Res3" 1608[0603] 2693,2688 r90 top
R6 "Res3" 1608[0603] 1081,633 r0 bottom
R7 "Res3" 1608[0603] 1081,702 r0 bottom
R8 "Res3" 1608[0603] 1081,771 r0 bottom
R9 "Res3" 1608[0603] 1081,840 r0 bottom
R10 "Res3" 1608[0603] 1229,453 r90 top
R11 "Res3" 1608[0603] 1598,603 r180 top
R12 "Res3" 1608[0603] 1598,737 r180 top
R13 "Res3" 1608[0603] 1598,670 r180 top
R14 "Res3" 1608[0603] 1598,875 r180 top
R15 "Res3" 1608[0603] 1598,806 r180 top
R16 "Res3" 1608[0603] 348,824 r0 bottom
R17 "Res3" 1608[0603] 348,756 r0 bottom
R18 "Res3" 1608[0603] 2074,641 r0 top
R19 "Res3" 1608[0603] 1367,453 r270 top
R20 "Res3" 1608[0603] 1081,564 r180 bottom
R21 "Res3" 1608[0603] 1270,453 r270 bottom
R22 "Res3" 1608[0603] 793,2267 r180 bottom
R23 "Res3" 1608[0603] 448,1940 r270 top locked
R24 "Res3" 1608[0603] 1077,2227 r0 bottom
R25 "Res3" 1608[0603] 128,2072 r180 bottom
R26 "Res3" 1608[0603] 737,2648 r180 top locked
R27 "Res3" 1608[0603] 737,2578 r180 top locked
R28 "Res3" 1608[0603] 1172,2429 r90 top
R29 "Res3" 1608[0603] 1241,2429 r90 top
R30 "Res3" 1608[0603] 1222,2823 r0 top
R31 "Res3" 1608[0603] 1310,2429 r90 top
R32 "Res3" 1608[0603] 1222,2755 r0 top
R33 "Res3" 1608[0603] 1377,2429 r90 top
R34 "Res3" 1608[0603] 1049,2890 r90 top
R35 "Res3" 1608[0603] 1118,2890 r90 top
R36 "Res3" 1608[0603] 1606,2006 r0 bottom
R37 "Res3" 1608[0603] 1606,1938 r0 bottom
R38 "Res3" 1608[0603] 2076,2888 r180 top
R39 "Res3" 1608[0603] 1670,1258 r270 top
R40 "Res3" 1608[0603] 1739,1258 r270 top
R41 "Res3" 1608[0603] 1808,1258 r270 top
R42 "Res3" 1608[0603] 1058,1349 r0 bottom
R43 "Res3" 1608[0603] 1670,1258 r90 bottom
R44 "Res3" 1608[0603] 1739,1258 r90 bottom
R45 "Res3" 1608[0603] 1808,1258 r90 bottom
R46 "Res3" 1608[0603] 1209,1877 r270 bottom
R50 "Res3" 1608[0603] 4315,903 r180 top
R51 "Res3" 1608[0603] 3694,927 r0 top
R52 "Res3" 1608[0603] 4316,1243 r180 top
R53 "Res3" 1608[0603] 3694,1131 r0 top
R54 "Res3" 1608[0603] 4315,767 r0 top
R55 "Res3" 1608[0603] 4315,767 r180 bottom
R56 "Res3" 1608[0603] 4315,835 r0 top
R57 "Res3" 1608[0603] 4315,835 r180 bottom
R58 "Res3" 1608[0603] 4316,1380 r0 bottom
R59 "Res3" 1608[0603] 4316,1380 r180 top
R60 "Res3" 1608[0603] 4316,1311 r0 top
R61 "Res3" 1608[0603] 4316,1311 r180 bottom
R62 "Res3" 1608[0603] 3694,1268 r180 top
R63 "Res3" 1608[0603] 3694,1199 r0 top
R64 "Res3" 1608[0603] 4316,1039 r0 bottom
R65 "Res3" 1608[0603] 4316,1107 r0 top
R66 "Res3" 1608[0603] 4315,903 r0 bottom
R67 "Res3" 1608[0603] 4316,971 r0 top
R68 "Res3" 1608[0603] 4315,971 r0 bottom
R69 "Res3" 2012[0805] 4416,617 r0 top
R70 "Res3" 1608[0603] 4004,761 r270 bottom
R71 "Res3" 1608[0603] 3937,761 r270 bottom
R72 "Res3" 1608[0603] 3694,995 r180 top
R73 "Res3" 1608[0603] 3694,995 r180 bottom
R74 "Res3" 1608[0603] 4316,1175 r0 bottom
R75 "Res3" 1608[0603] 4316,1175 r0 top
R76 "Res3" 1608[0603] 3694,1063 r180 top
R77 "Res3" 1608[0603] 3694,1063 r180 bottom
R78 "Res3" 1608[0603] 4044,1477 r270 top
R79 "Res3" 1608[0603] 4044,1617 r90 top
R80 "Res3" 2012[0805] 3588,469 r180 top
R81 "Res3" 2012[0805] 4235,1740 r180 top
R82 "Res3" 2012[0805] 3794,1740 r0 top
R83 "Res3" 1608[0603] 3881,1949 r180 top
R84 "Res3" 1608[0603] 3985,1915 r90 top
R85 "Res3" 1608[0603] 4054,1915 r90 top
R86 "Res3" 1608[0603] 4274,1986 r90 top
R87 "Res3" 1608[0603] 4240,2090 r0 top
R88 "Res3" 1608[0603] 4240,2090 r180 bottom
RJ1 "RJ45" RJ45-1 496.95,788 r270 top locked
S1 "SW-PB" SPST-2 2116,3067 r180 top
SW2 "PowerSW" POWER_SW 3380,2746 r0 top locked
TX1 "LINK" 0805LED 1078,2225 r180 top
U1 "MT41K128M16JT -125:K" MT41K128M16JT 2630,2405 r0 top locked
U2 "DP83848JSQ/NOPB" DP83848J 1337,699 r270 top locked
U3 "XC7A35T-1CSG324I" CSG324 2600,1450 r45 top
U4 "ZEN056V130A24LS" ZEN056 470,2200 r90 bottom locked
U5 "CP2102" CP2102[QFN28] 800,2096 r0 bottom locked
U6 "N25Q128A13BSE40F" N25Q128A13BSE40F[SOP-8] 9459,1905 r90 top
U7 "cdce913" CDCE913[TSSOP-14] 10335,2446 r0 top
U8 "ZEN056V130A24LS" ZEN056 499,2748 r90 top locked
U9 "AT90USB162-16MUR" AT90USB162-16MUR 996,2667 r90 top locked
U10 "CYUSB3014-BZXC" CYUSB3014 1370,1568 r90 top locked
U11 "TPD4EUSB30DQAR" TPD4EUSB30 305,1304 r90 top locked
U12 "AT24C256C" AT24C256C[SOP8] 1867,1922 r180 top
U13 "TPD2EUSB30" TPE2USB30 365,1535 r90 top locked
U14 "ADP5052ACP" ADP5052 4005,1049 r270 top locked
U15 "JTYZ" JTYZ 3400,2087 r270 top
U16 "ADP2384ACP" ADP2384 4021,2122 r180 top locked
Y1 "8MHz" XTAL_A 1876,541 r270 top
Y2 "8MHz" XTAL_A 831,2394 r180 top locked
Y3 "19.2MHz" XTAL_A 715,1757 r270 top locked

## Footprints (in the part's own frame and the unit in brackets; to place one, negate y for a bottom-side part, rotate by r counter-clockwise, add the part's x,y. Pads: shape width x height; smd on the part's side, far side on the other; paste and mask are expansions set on the pad)
0402 [mm]
  rect 0.8x0.6 smd: 1(-0.6,0) 2(0.6,0)
  silkscreen extent -1.22,-0.52 1.22,0.52, body extent -0.55,-0.3 0.55,0.3, height 0.6
0805LED [mil]
  rect 60x50 smd: 1(-45,0) 2(45,0)
  silkscreen extent -95,-45 95,46
1608[0603] [mm]
  rect 1.1x1 smd: 1(-0.85,0) 2(0.85,0)
  silkscreen extent -1.65,-0.76 1.65,0.76
2012[0805] [mil]
  rect 65x50 smd: 1(-50,0) 2(50,0)
  silkscreen extent -95,-45 95,45
ADP2384 [mm]
  rect 0.75x0.3 smd: 1(-2,1.25) 2(-2,0.75) 3(-2,0.25) 4(-2,-0.25) 5(-2,-0.75) 6(-2,-1.25) 13(2,-1.25) 14(2,-0.75) 15(2,-0.25) 16(2,0.25) 17(2,0.75) 18(2,1.25)
  rect 0.3x0.75 smd: 7(-1.25,-2) 8(-0.75,-2) 9(-0.25,-2) 10(0.25,-2) 11(0.75,-2) 12(1.25,-2) 19(1.25,2) 20(0.75,2) 21(0.25,2) 22(-0.25,2) 23(-0.75,2) 24(-1.25,2)
  rect 2.6x1.4 smd: 25(0,0.7)
  rect 2.6x0.9 smd: 26(0,-0.9)
  silkscreen extent -2.73,-2.05 2.05,2.07
ADP5052 [mm]
  oval 0.85x0.3 smd: 1(-3.45,2.75) 2(-3.45,2.25) 3(-3.45,1.75) 4(-3.45,1.25) 5(-3.45,0.75) 6(-3.45,0.25) 7(-3.45,-0.25) 8(-3.45,-0.75) 9(-3.45,-1.25) 10(-3.45,-1.75) 11(-3.45,-2.25) 12(-3.45,-2.75) 25(3.45,-2.75) 26(3.45,-2.25) 27(3.45,-1.75) 28(3.45,-1.25) 29(3.45,-0.75) 30(3.45,-0.25) 31(3.45,0.25) 32(3.45,0.75) 33(3.45,1.25) 34(3.45,1.75) 35(3.45,2.25) 36(3.45,2.75)
  oval 0.3x0.85 smd: 13(-2.75,-3.45) 14(-2.25,-3.45) 15(-1.75,-3.45) 16(-1.25,-3.45) 17(-0.75,-3.45) 18(-0.25,-3.45) 19(0.25,-3.45) 20(0.75,-3.45) 21(1.25,-3.45) 22(1.75,-3.45) 23(2.25,-3.45) 24(2.75,-3.45) 37(2.75,3.45) 38(2.25,3.45) 39(1.75,3.45) 40(1.25,3.45) 41(0.75,3.45) 42(0.25,3.45) 43(-0.25,3.45) 44(-0.75,3.45) 45(-1.25,3.45) 46(-1.75,3.45) 47(-2.25,3.45) 48(-2.75,3.45)
  rect 5.5x5.5 smd: 49(0,0)
  silkscreen extent -4.22,-3.55 3.55,3.58, body extent -3.15,-3.15 3.05,3.05, height 0.8
AT24C256C[SOP8] [mm]
  rect 2.5x0.5 smd: 1(-3,1.905)
  oval 2.5x0.5 smd: 2(-3,0.635) 3(-3,-0.635) 4(-3,-1.905) 5(3,-1.905) 6(3,-0.635) 7(3,0.635) 8(3,1.905)
  silkscreen extent -0.91,-2.54 0.92,2.54
AT90USB162-16MUR [mm]
  oval 0.8x0.3 smd: 1(-2.45,1.75) 2(-2.45,1.25) 3(-2.45,0.75) 4(-2.45,0.25) 5(-2.45,-0.25) 6(-2.45,-0.75) 7(-2.45,-1.25) 8(-2.45,-1.75) 17(2.45,-1.75) 18(2.45,-1.25) 19(2.45,-0.75) 20(2.45,-0.25) 21(2.45,0.25) 22(2.45,0.75) 23(2.45,1.25) 24(2.45,1.75)
  oval 0.3x0.8 smd: 9(-1.75,-2.45) 10(-1.25,-2.45) 11(-0.75,-2.45) 12(-0.25,-2.45) 13(0.25,-2.45) 14(0.75,-2.45) 15(1.25,-2.45) 16(1.75,-2.45) 25(1.75,2.45) 26(1.25,2.45) 27(0.75,2.45) 28(0.25,2.45) 29(-0.25,2.45) 30(-0.75,2.45) 31(-1.25,2.45) 32(-1.75,2.45)
  rect 3.5x3.5 smd: 33(0,0)
  silkscreen extent -3.17,-2.5 2.5,2.57, body extent -2.54,-2.54 2.54,2.54, height 1
CDCE913[TSSOP-14] [mm]
  oval 1.6x0.35 smd: 1(-2.85,1.95) 2(-2.85,1.3) 3(-2.85,0.65) 4(-2.85,0) 5(-2.85,-0.65) 6(-2.85,-1.3) 7(-2.85,-1.95) 8(2.85,-1.95) 9(2.85,-1.3) 10(2.85,-0.65) 11(2.85,0) 12(2.85,0.65) 13(2.85,1.3) 14(2.85,1.95)
  silkscreen extent -3.52,-2.55 1.7,2.87
CP2102[QFN28] [mm]
  oval 1x0.25 smd: 1(-2.4,1.5) 2(-2.4,1) 3(-2.4,0.5) 4(-2.4,0) 5(-2.4,-0.5) 6(-2.4,-1) 7(-2.4,-1.5) 15(2.4,-1.5) 16(2.4,-1) 17(2.4,-0.5) 18(2.4,0) 19(2.4,0.5) 20(2.4,1) 21(2.4,1.5)
  oval 0.25x1 smd: 8(-1.5,-2.4) 9(-1,-2.4) 10(-0.5,-2.4) 11(0,-2.4) 12(0.5,-2.4) 13(1,-2.4) 14(1.5,-2.4) 22(1.5,2.4) 23(1,2.4) 24(0.5,2.4) 25(0,2.4) 26(-0.5,2.4) 27(-1,2.4) 28(-1.5,2.4)
  rect 3.2x3.2 smd: 29(0,0)
  silkscreen extent -3.17,-2.5 2.5,2.5, body extent -2.54,-2.54 2.54,2.54, height 1
CSG324 [mm] "BGA, 324-Balls, Body 15x15mm, Pitch 0.8mm"
  round 0.35 smd: A1(-6.8,6.8) A2(-6,6.8) A3(-5.2,6.8) A4(-4.4,6.8) A5(-3.6,6.8) A6(-2.8,6.8) A7(-2,6.8) A8(-1.2,6.8) A9(-0.4,6.8) A10(0.4,6.8) A11(1.2,6.8) A12(2,6.8) A13(2.8,6.8) A14(3.6,6.8) A15(4.4,6.8) A16(5.2,6.8) A17(6,6.8) A18(6.8,6.8) B1(-6.8,6) B2(-6,6) B3(-5.2,6) B4(-4.4,6) B5(-3.6,6) B6(-2.8,6) B7(-2,6) B8(-1.2,6) B9(-0.4,6) B10(0.4,6) B11(1.2,6) B12(2,6) B13(2.8,6) B14(3.6,6) B15(4.4,6) B16(5.2,6) B17(6,6) B18(6.8,6) C1(-6.8,5.2) C2(-6,5.2) C3(-5.2,5.2) C4(-4.4,5.2) C5(-3.6,5.2) C6(-2.8,5.2) C7(-2,5.2) C8(-1.2,5.2) C9(-0.4,5.2) C10(0.4,5.2) C11(1.2,5.2) C12(2,5.2) C13(2.8,5.2) C14(3.6,5.2) C15(4.4,5.2) C16(5.2,5.2) C17(6,5.2) C18(6.8,5.2) D1(-6.8,4.4) D2(-6,4.4) D3(-5.2,4.4) D4(-4.4,4.4) D5(-3.6,4.4) D6(-2.8,4.4) D7(-2,4.4) D8(-1.2,4.4) D9(-0.4,4.4) D10(0.4,4.4) D11(1.2,4.4) D12(2,4.4) D13(2.8,4.4) D14(3.6,4.4) D15(4.4,4.4) D16(5.2,4.4) D17(6,4.4) D18(6.8,4.4) E1(-6.8,3.6) E2(-6,3.6) E3(-5.2,3.6) E4(-4.4,3.6) E5(-3.6,3.6) E6(-2.8,3.6) E7(-2,3.6) E8(-1.2,3.6) E9(-0.4,3.6) E10(0.4,3.6) E11(1.2,3.6) E12(2,3.6) E13(2.8,3.6) E14(3.6,3.6) E15(4.4,3.6) E16(5.2,3.6) E17(6,3.6) E18(6.8,3.6) F1(-6.8,2.8) F2(-6,2.8) F3(-5.2,2.8) F4(-4.4,2.8) F5(-3.6,2.8) F6(-2.8,2.8) F7(-2,2.8) F8(-1.2,2.8) F9(-0.4,2.8) F10(0.4,2.8) F11(1.2,2.8) F12(2,2.8) F13(2.8,2.8) F14(3.6,2.8) F15(4.4,2.8) F16(5.2,2.8) F17(6,2.8) F18(6.8,2.8) G1(-6.8,2) G2(-6,2) G3(-5.2,2) G4(-4.4,2) G5(-3.6,2) G6(-2.8,2) G7(-2,2) G8(-1.2,2) G9(-0.4,2) G10(0.4,2) G11(1.2,2) G12(2,2) G13(2.8,2) G14(3.6,2) G15(4.4,2) G16(5.2,2) G17(6,2) G18(6.8,2) H1(-6.8,1.2) H2(-6,1.2) H3(-5.2,1.2) H4(-4.4,1.2) H5(-3.6,1.2) H6(-2.8,1.2) H7(-2,1.2) H8(-1.2,1.2) H9(-0.4,1.2) H10(0.4,1.2) H11(1.2,1.2) H12(2,1.2) H13(2.8,1.2) H14(3.6,1.2) H15(4.4,1.2) H16(5.2,1.2) H17(6,1.2) H18(6.8,1.2) J1(-6.8,0.4) J2(-6,0.4) J3(-5.2,0.4) J4(-4.4,0.4) J5(-3.6,0.4) J6(-2.8,0.4) J7(-2,0.4) J8(-1.2,0.4) J9(-0.4,0.4) J10(0.4,0.4) J11(1.2,0.4) J12(2,0.4) J13(2.8,0.4) J14(3.6,0.4) J15(4.4,0.4) J16(5.2,0.4) J17(6,0.4) J18(6.8,0.4) K1(-6.8,-0.4) K2(-6,-0.4) K3(-5.2,-0.4) K4(-4.4,-0.4) K5(-3.6,-0.4) K6(-2.8,-0.4) K7(-2,-0.4) K8(-1.2,-0.4) K9(-0.4,-0.4) K10(0.4,-0.4) K11(1.2,-0.4) K12(2,-0.4) K13(2.8,-0.4) K14(3.6,-0.4) K15(4.4,-0.4) K16(5.2,-0.4) K17(6,-0.4) K18(6.8,-0.4) L1(-6.8,-1.2) L2(-6,-1.2) L3(-5.2,-1.2) L4(-4.4,-1.2) L5(-3.6,-1.2) L6(-2.8,-1.2) L7(-2,-1.2) L8(-1.2,-1.2) L9(-0.4,-1.2) L10(0.4,-1.2) L11(1.2,-1.2) L12(2,-1.2) L13(2.8,-1.2) L14(3.6,-1.2) L15(4.4,-1.2) L16(5.2,-1.2) L17(6,-1.2) L18(6.8,-1.2) M1(-6.8,-2) M2(-6,-2) M3(-5.2,-2) M4(-4.4,-2) M5(-3.6,-2) M6(-2.8,-2) M7(-2,-2) M8(-1.2,-2) M9(-0.4,-2) M10(0.4,-2) M11(1.2,-2) M12(2,-2) M13(2.8,-2) M14(3.6,-2) M15(4.4,-2) M16(5.2,-2) M17(6,-2) M18(6.8,-2) N1(-6.8,-2.8) N2(-6,-2.8) N3(-5.2,-2.8) N4(-4.4,-2.8) N5(-3.6,-2.8) N6(-2.8,-2.8) N7(-2,-2.8) N8(-1.2,-2.8) N9(-0.4,-2.8) N10(0.4,-2.8) N11(1.2,-2.8) N12(2,-2.8) N13(2.8,-2.8) N14(3.6,-2.8) N15(4.4,-2.8) N16(5.2,-2.8) N17(6,-2.8) N18(6.8,-2.8) P1(-6.8,-3.6) P2(-6,-3.6) P3(-5.2,-3.6) P4(-4.4,-3.6) P5(-3.6,-3.6) P6(-2.8,-3.6) P7(-2,-3.6) P8(-1.2,-3.6) P9(-0.4,-3.6) P10(0.4,-3.6) P11(1.2,-3.6) P12(2,-3.6) P13(2.8,-3.6) P14(3.6,-3.6) P15(4.4,-3.6) P16(5.2,-3.6) P17(6,-3.6) P18(6.8,-3.6) R1(-6.8,-4.4) R2(-6,-4.4) R3(-5.2,-4.4) R4(-4.4,-4.4) R5(-3.6,-4.4) R6(-2.8,-4.4) R7(-2,-4.4) R8(-1.2,-4.4) R9(-0.4,-4.4) R10(0.4,-4.4) R11(1.2,-4.4) R12(2,-4.4) R13(2.8,-4.4) R14(3.6,-4.4) R15(4.4,-4.4) R16(5.2,-4.4) R17(6,-4.4) R18(6.8,-4.4) T1(-6.8,-5.2) T2(-6,-5.2) T3(-5.2,-5.2) T4(-4.4,-5.2) T5(-3.6,-5.2) T6(-2.8,-5.2) T7(-2,-5.2) T8(-1.2,-5.2) T9(-0.4,-5.2) T10(0.4,-5.2) T11(1.2,-5.2) T12(2,-5.2) T13(2.8,-5.2) T14(3.6,-5.2) T15(4.4,-5.2) T16(5.2,-5.2) T17(6,-5.2) T18(6.8,-5.2) U1(-6.8,-6) U2(-6,-6) U3(-5.2,-6) U4(-4.4,-6) U5(-3.6,-6) U6(-2.8,-6) U7(-2,-6) U8(-1.2,-6) U9(-0.4,-6) U10(0.4,-6) U11(1.2,-6) U12(2,-6) U13(2.8,-6) U14(3.6,-6) U15(4.4,-6) U16(5.2,-6) U17(6,-6) U18(6.8,-6) V1(-6.8,-6.8) V2(-6,-6.8) V3(-5.2,-6.8) V4(-4.4,-6.8) V5(-3.6,-6.8) V6(-2.8,-6.8) V7(-2,-6.8) V8(-1.2,-6.8) V9(-0.4,-6.8) V10(0.4,-6.8) V11(1.2,-6.8) V12(2,-6.8) V13(2.8,-6.8) V14(3.6,-6.8) V15(4.4,-6.8) V16(5.2,-6.8) V17(6,-6.8) V18(6.8,-6.8)
  silkscreen extent -8.27,-7.5 7.5,7.5, body extent -7.5,-7.5 7.5,7.5, height 1.5
CYUSB3014 [mil]
  round 10 smd: A1(-157.48,157.48) A2(-125.98,157.48) A3(-94.49,157.48) A4(-62.99,157.48) A5(-31.5,157.48) A6(0,157.48) A7(31.5,157.48) A8(62.99,157.48) A9(94.49,157.48) A10(125.98,157.48) A11(157.48,157.48) B1(-157.48,125.98) B2(-125.98,125.98) B3(-94.49,125.98) B4(-62.99,125.98) B5(-31.5,125.98) B6(0,125.98) B7(31.5,125.98) B8(62.99,125.98) B9(94.49,125.98) B10(125.98,125.98) B11(157.48,125.98) C1(-157.48,94.49) C2(-125.98,94.49) C3(-94.49,94.49) C4(-62.99,94.49) C5(-31.5,94.49) C6(0,94.49) C7(31.5,94.49) C8(62.99,94.49) C9(94.49,94.49) C10(125.98,94.49) C11(157.48,94.49) D1(-157.48,62.99) D2(-125.98,62.99) D3(-94.49,62.99) D4(-62.99,62.99) D5(-31.5,62.99) D6(0,62.99) D7(31.5,62.99) D8(62.99,62.99) D9(94.49,62.99) D10(125.98,62.99) D11(157.48,62.99) E1(-157.48,31.5) E2(-125.98,31.5) E3(-94.49,31.5) E4(-62.99,31.5) E5(-31.5,31.5) E6(0,31.5) E7(31.5,31.5) E8(62.99,31.5) E9(94.49,31.5) E10(125.98,31.5) E11(157.48,31.5) F1(-157.48,0) F2(-125.98,0) F3(-94.49,0) F4(-62.99,0) F5(-31.5,0) F6(0,0) F7(31.5,0) F8(62.99,0) F9(94.49,0) F10(125.98,0) F11(157.48,0) G1(-157.48,-31.5) G2(-125.98,-31.5) G3(-94.49,-31.5) G4(-62.99,-31.5) G5(-31.5,-31.5) G6(0,-31.5) G7(31.5,-31.5) G8(62.99,-31.5) G9(94.49,-31.5) G10(125.98,-31.5) G11(157.48,-31.5) H1(-157.48,-62.99) H2(-125.98,-62.99) H3(-94.49,-62.99) H4(-62.99,-62.99) H5(-31.5,-62.99) H6(0,-62.99) H7(31.5,-62.99) H8(62.99,-62.99) H9(94.49,-62.99) H10(125.98,-62.99) H11(157.48,-62.99) J1(-157.48,-94.49) J2(-125.98,-94.49) J3(-94.49,-94.49) J4(-62.99,-94.49) J5(-31.5,-94.49) J6(0,-94.49) J7(31.5,-94.49) J8(62.99,-94.49) J9(94.49,-94.49) J10(125.98,-94.49) J11(157.48,-94.49) K1(-157.48,-125.98) K2(-125.98,-125.98) K3(-94.49,-125.98) K4(-62.99,-125.98) K5(-31.5,-125.98) K6(0,-125.98) K7(31.5,-125.98) K8(62.99,-125.98) K9(94.49,-125.98) K10(125.98,-125.98) K11(157.48,-125.98) L1(-157.48,-157.48) L2(-125.98,-157.48) L3(-94.49,-157.48) L4(-62.99,-157.48) L5(-31.5,-157.48) L6(0,-157.48) L7(31.5,-157.48) L8(62.99,-157.48) L9(94.49,-157.48) L10(125.98,-157.48) L11(157.48,-157.48)
  silkscreen extent -236,-236 236,236, body extent -200,-195 200,200, height 40
DNP [mm] "Connector; Header; 5x2 Position"
  rect 1.5x1.5 hole 0.9: 1(0,-1.27)
  round 1.5 hole 0.9: 2(0,1.27)
  silkscreen extent -1.27,-2.54 1.27,2.54
DP83848J [mm]
  rect 0.6x0.25 smd: 1(-2.9,2.25) 2(-2.9,1.75) 3(-2.9,1.25) 4(-2.9,0.75) 5(-2.9,0.25) 6(-2.9,-0.25) 7(-2.9,-0.75) 8(-2.9,-1.25) 9(-2.9,-1.75) 10(-2.9,-2.25) 21(2.9,-2.25) 22(2.9,-1.75) 23(2.9,-1.25) 24(2.9,-0.75) 25(2.9,-0.25) 26(2.9,0.25) 27(2.9,0.75) 28(2.9,1.25) 29(2.9,1.75) 30(2.9,2.25)
  rect 0.25x0.6 smd: 11(-2.25,-2.9) 12(-1.75,-2.9) 13(-1.25,-2.9) 14(-0.75,-2.9) 15(-0.25,-2.9) 16(0.25,-2.9) 17(0.75,-2.9) 18(1.25,-2.9) 19(1.75,-2.9) 20(2.25,-2.9) 31(2.25,2.9) 32(1.75,2.9) 33(1.25,2.9) 34(0.75,2.9) 35(0.25,2.9) 36(-0.25,2.9) 37(-0.75,2.9) 38(-1.25,2.9) 39(-1.75,2.9) 40(-2.25,2.9)
  rect 4.7x4.7 smd paste-2.337: 41(0,0)
  silkscreen extent -3.78,-3.05 3.05,3.05, body extent -3.15,-3.15 3.05,3.05, height 0.8
FDS9926A [mm]
  rect 1.6x0.51 smd: 1(0,0)
  oval 1.6x0.51 smd: 2(0,-1.27) 3(0,-2.54) 4(0,-3.81) 5(5.5,-3.81) 6(5.5,-2.54) 7(5.5,-1.27) 8(5.5,0)
  silkscreen extent 1.63,-4.45 3.87,0.63
HDR2X5 [mm] "Connector; Header; 5x2 Position"
  rect 1.5x1.5 hole 0.9: 1(0,0)
  round 1.5 hole 0.9: 2(0,2.54) 3(2.54,0) 4(2.54,2.54) 5(5.08,0) 6(5.08,2.54) 7(7.62,0) 8(7.62,2.54) 9(10.16,0) 10(10.16,2.54)
  silkscreen extent -1.27,-1.27 11.43,3.81
JTYZ [mil]
  rect 72x72 hole 48: 1(-98.42,99.21)
  round 72 hole 48: 3(-98.42,-97.64) 5(98.43,-97.64) 6(0,0.79) 7(0,197.64) 8(98.43,99.21)
  silkscreen extent -217,-235 217,237
MT41K128M16JT [mm]
  round 0.35 smd: A1(-6,-3.2) A2(-6,-2.4) A3(-6,-1.6) A7(-6,1.6) A8(-6,2.4) A9(-6,3.2) B1(-5.2,-3.2) B2(-5.2,-2.4) B3(-5.2,-1.6) B7(-5.2,1.6) B8(-5.2,2.4) B9(-5.2,3.2) C1(-4.4,-3.2) C2(-4.4,-2.4) C3(-4.4,-1.6) C7(-4.4,1.6) C8(-4.4,2.4) C9(-4.4,3.2) D1(-3.6,-3.2) D2(-3.6,-2.4) D3(-3.6,-1.6) D7(-3.6,1.6) D8(-3.6,2.4) D9(-3.6,3.2) E1(-2.8,-3.2) E2(-2.8,-2.4) E3(-2.8,-1.6) E7(-2.8,1.6) E8(-2.8,2.4) E9(-2.8,3.2) F1(-2,-3.2) F2(-2,-2.4) F3(-2,-1.6) F7(-2,1.6) F8(-2,2.4) F9(-2,3.2) G1(-1.2,-3.2) G2(-1.2,-2.4) G3(-1.2,-1.6) G7(-1.2,1.6) G8(-1.2,2.4) G9(-1.2,3.2) H1(-0.4,-3.2) H2(-0.4,-2.4) H3(-0.4,-1.6) H7(-0.4,1.6) H8(-0.4,2.4) H9(-0.4,3.2) J1(0.4,-3.2) J2(0.4,-2.4) J3(0.4,-1.6) J7(0.4,1.6) J8(0.4,2.4) J9(0.4,3.2) K1(1.2,-3.2) K2(1.2,-2.4) K3(1.2,-1.6) K7(1.2,1.6) K8(1.2,2.4) K9(1.2,3.2) L1(2,-3.2) L2(2,-2.4) L3(2,-1.6) L7(2,1.6) L8(2,2.4) L9(2,3.2) M1(2.8,-3.2) M2(2.8,-2.4) M3(2.8,-1.6) M7(2.8,1.6) M8(2.8,2.4) M9(2.8,3.2) N1(3.6,-3.2) N2(3.6,-2.4) N3(3.6,-1.6) N7(3.6,1.6) N8(3.6,2.4) N9(3.6,3.2) P1(4.4,-3.2) P2(4.4,-2.4) P3(4.4,-1.6) P7(4.4,1.6) P8(4.4,2.4) P9(4.4,3.2) R1(5.2,-3.2) R2(5.2,-2.4) R3(5.2,-1.6) R7(5.2,1.6) R8(5.2,2.4) R9(5.2,3.2) T1(6,-3.2) T2(6,-2.4) T3(6,-1.6) T7(6,1.6) T8(6,2.4) T9(6,3.2)
  silkscreen extent -8.28,-5.27 8.28,5.27, body extent -7.01,-3.99 6.98,4.01, height 1.1
N25Q128A13BSE40F[SOP-8] [mm]
  oval 1.6x0.6 smd: 1(-3.6,1.905) 2(-3.6,0.635) 3(-3.6,-0.635) 4(-3.6,-1.905) 5(3.6,-1.905) 6(3.6,-0.635) 7(3.6,0.635) 8(3.6,1.905)
  silkscreen extent -4.27,-2.75 2.45,2.87
PESD0402-140 [mm]
  rect 0.6x0.7 smd: 1(0,0) 2(1.1,0)
  silkscreen extent -0.55,-0.6 1.65,0.6
POWER2X3 [mil]
  round 110 hole 71: 1(-165.35,-35.1) 2(0,-35.1) 3(165.35,-35.1) 4(-165.35,-251.64) 5(0,-251.64) 6(165.35,-251.64)
  silkscreen extent -275,-33 275,412
POWER_SW [mil]
  round 100 hole 73: 1(-185,-175) 2(0,-175) 3(185,-175) 4(-185,-325) 5(0,-325) 6(185,-325) " "(-260,325) " "(260,325)
  silkscreen extent -261,-121 260,550
RJ45-1 [mm]
  round 1.5 hole 0.914: 1(-4.445,4.293) 2(-3.175,6.833) 3(-1.905,4.293) 4(-0.635,6.833) 5(0.635,4.293) 6(1.905,6.833) 7(3.175,4.293) 8(4.445,6.833) 9(-6.625,-6.832) 10(-4.085,-6.832) 11(4.085,-6.832) 12(6.625,-6.832)
  oval 2.032x2.54 hole 1.6: 13(-7.745,1.118) 14(7.745,1.118)
  round 3.3 hole 3.3: 15(-5.715,-1.932) 16(5.715,-1.932)
  silkscreen extent -8.25,-13.11 8.26,8.55, body extent -7.88,-12.73 8,8.67, height 13.51
SPST-2 [mm] "Circuit Breaker; 2 Leads"
  rect 1.85x1.85 hole 1.1: 1(-2.54,0)
  round 1.85 hole 1.1: 2(2.54,0)
  silkscreen extent -4.89,-1.27 4.28,1.27
SRN4018 [mm]
  rect 1.5x3.6 smd: 1(-1.525,0)
  rect 1.5x3.63 smd: 2(1.525,0)
  silkscreen extent -2.6,-2.6 2.6,2.6
SRN6045 [mm]
  rect 2x6 smd: 1(-2.15,0) 2(2.15,0)
  silkscreen extent -3.45,-3.45 3.45,3.45
TPD4EUSB30 [mm]
  rect 0.3x0.55 smd: 1(-1,-0.385) 2(-0.5,-0.385) 4(0.5,-0.385) 5(1,-0.385) 6(1,0.385) 7(0.5,0.385) 9(-0.5,0.385) 10(-1,0.385)
  rect 0.4x0.55 smd: 3(0,-0.385) 8(0,0.385)
  silkscreen extent -1.4,-1.4 1.4,0.89
TPE2USB30 [mm]
  rect 0.3x0.3 smd: 1(-0.35,-0.425) 2(0.35,-0.425) 3(0,0.425)
  silkscreen extent -0.76,-0.84 0.76,0.81
USB_MINI_BTYPE [mil]
  rect 20x80 smd: 1(-62.99,109.25) 2(-31.5,109.25) 3(0,109.25) 4(31.5,109.25) 5(62.99,109.25)
  rect 98x86 smd: 6(165.35,99.41) 7(165.35,-109.25) 8(-165.35,-109.25) 9(-165.35,99.41)
  round 37 hole 37: " "(-68.9,20.67) " "(68.9,20.67)
  silkscreen extent -195,-231 195,123
XTAL_A [mil]
  round 60 hole 32: 1(98.43,0) 2(-98.43,0)
  silkscreen extent -197,-98 197,98
ZEN056 [mm]
  rect 1x2.21 smd: 1(-2,0)
  rect 1x0.94 smd: 2(2,0.635) 3(2,-0.635)
  silkscreen extent -3,-2 3,2
ZX360D-B-10P [mm]
  rect 0.4x1.35 smd: 1(-4.164,1.338) 2(-3.514,1.338) 3(-2.864,1.338) 4(-2.214,1.338) 5(-1.564,1.338) 6(2.536,1.338) 7(3.186,1.338) 8(3.836,1.338) 9(4.486,1.338) 10(5.136,1.338)
  rect 1.9x1.9 smd: 11(-4.064,-1.338) 12(-1.664,-1.338)
  rect 1.8x1.9 smd: 13(1.136,-1.338) 14(3.636,-1.338)
  rect 2.1x1.6 smd: 15(-5.964,1.213)
  rect 1x1.6 smd: 16(6.386,1.213)
  oval 1.54x1.9 hole 0.825 slot 1.5 at 90 deg: 17(-6.386,-1.338) 18(5.989,-1.338)
  silkscreen extent -7.44,-3.24 7.17,2.47, body extent -6.98,-4.02 6.59,1.58, height 2.83

## Part data
C1 C2 C3 C4 C5 C6 C7 C8 C9 C10 C11 C12 C13 C14 C15 C16 C17 C18 C19 C20 C21 C22 C23 C24 C25 C26 C27 C28 C29 C30 C31 C32 C33 C34 C35 C36 C37 C38 C39 C40 C41 C42 C43 C44 C45 C46 C47 C48 C49 C50 C51 C52 C53 C54 C55 C56 C57 C58 C59 C60 C61 C62 C63 C64 C65 C66 C67 C68 C69 C70 C71 C72 C73 C74 C75 C76 C77 C78 C79 C80 C81 C82 C83 C84 C85 C86 C87 C88 C89 C90 C91 C92 C93 C94 C95 C96 C97 C98 C99 C100 C101 C102 C103 C104 C105 C106 C107 C108 C109 C110 C111 C112 C113 C114 C115 C116 C117 C118 C119 C120 C121 C122 C123 C124 C125 C126 C127 C128 C129 C130 C131 C132 C133 C134 C135 C136 C137 C138 C139 C140 C141 C142 C143 C144 C145 C146 C147 C148 C149 C150 C151 C152 C153 C154 C155 C156 C160 C161 C162 C163 C164 C165 C166 C167 C168 C169 C170 C171 C172 C173 C174 C175 C176 C177 C178 C179 C180 C181 C182 C183 C184 C185 C186 C187 C188 C189 C190: library part "Cap Semi", "Capacitor (Semiconductor SIM Model)"
D1 D2 D3 D4: "ESD保护器件"
FB1 FB2 FB3 FB4 FB5 FB6 FB7 FB8 FB9: library part Inductor, "Inductor"
L1 L2 L3 L4 L5: "Magnetic-Core Inductor"
P1 P2: "USB座"
P3 P5: "Header, 5-Pin, Dual row"
R1 R2 R3 R4 R5 R6 R7 R8 R9 R10 R11 R12 R13 R14 R15 R16 R17 R18 R19 R20 R21 R22 R23 R24 R25 R26 R27 R28 R29 R30 R31 R32 R33 R34 R35 R36 R37 R38 R39 R40 R41 R42 R43 R44 R45 R46 R50 R51 R52 R53 R54 R55 R56 R57 R58 R59 R60 R61 R62 R63 R64 R65 R66 R67 R68 R69 R70 R71 R72 R73 R74 R75 R76 R77 R78 R79 R80 R81 R82 R83 R84 R85 R86 R87 R88: "Resistor"
RJ1: "网口座"
S1: "Switch"
TX1: library part LED0, "Typical INFRARED GaAs LED"
U1: "DDR3L"
U3: "Artix-7 FPGA, 210 User I/Os, 0 GTP, 324-Ball BGA, Speed Grade 1, Industrial Grade, Pb-Free"
U4 U8: "电压瞬态抑制器"
U5: "Single Chip USB to UART Bridge"
U6: "128Mb, 3V, Multiple I/O Serial Flash Memory"
U7: "Flexible Low Power LVCMOS Clock Generator With SSC Support for EMI Reduction"
U11: "4-Channel ESD Protection for Super-Speed USB 3.0 Interface"
U14: library part ADP5052ACP\
Y1 Y2 Y3: library part XTAL, "Crystal Oscillator"

## Free pads (board coordinates)
  round 110 hole 137.8: ""(196.85,196.85) ""(196.85,2952.76) ""(4527.56,196.85) ""(4527.56,2952.76)

## Via types
v1: diameter 15, hole 8, Top Layer to Bottom Layer, 506 vias
v2: diameter 20, hole 10, Top Layer to Bottom Layer, 58 vias
v3: diameter 16, hole 8, Top Layer to Bottom Layer, 4 vias
v4: diameter 30, hole 15, Top Layer to Bottom Layer, 2 vias

## Nets (pads, with @x,y where several pads share a name; then routed paths per layer and width w, separated by ;. In a path a pad name is that pad's centre, name@x,y a point inside that pad or via, vN(x,y) a via of type N, cw(c..) or ccw(c..) an arc to the next point about the centre after c; other vN are vias at no path point)
+3V3_USB_A: C42.1 C43.1 C44.1 U9.4 U9.27 U9.32 | length 325.6
  Top Layer w10: C42.1@808.46,2856.54 C44.1@808.46,2717 828.94,2696.53 U9.27@899.54,2696.53 ; v2(873,2575) 896.1,2598.1 U9.32@899.54,2598.1 ; v2(986.16,2520.16) U9.4@986.16,2570.54
  other v2: 847,2751 846,2822
+3V3_USB_B: C39.1 R22.1 U5.6 | length 409.5
  Top Layer w8: v2(663,2142) C39.1@703.46,2142
  Top Layer w10: C39.1@703.46,2142 703.46,2233.46 737,2267 v2@872,2267
  Bottom Layer w8: v2(663,2142) 669,2142 669,2136 669.63,2135.37 U5.6@705.51,2135.37
  Bottom Layer w10: R22.1@824.46,2269 R22.1@826.46,2267 v2(870,2267)
+5V_USB_A: C41.1 U8.3 U9.31 | length 61.9
  Top Layer w10: 845,2600 862.79,2617.79 U9.31@899.54,2617.79
  other v2: 829,2575 580,2822 580,2872 580,2922
+5V_USB_B: C38.1 C40.1 U4.3 U5.7 U5.8 | length 123.4
  Bottom Layer w8: 650.51,2190.49 U5.8@740.94,2190.49 ; U5.7@705.51,2155.06 705.51,2188
AVCC1V8: C180.1 C189.1 FB8.1 R78.2 U14.7
CTL0: U3.C1 U10.K8 | length 44.5
  Top Layer w6: U10.K8@1495.98,1630.99 v1(1511.73,1646.74) ; v1(2243.66,1405.46) U3.C1@2265.93,1405.46
CTL1: U3.H1 U10.K7 | length 44.5
  Top Layer w6: U10.K7@1495.98,1599.5 v1(1511.73,1615.24) ; v1(2355.02,1294.1) U3.H1@2377.29,1294.1
CTL2: U3.G1 U10.J7 | length 44.5
  Top Layer w6: U10.J7@1464.49,1599.5 v1(1480.24,1615.24) ; v1(2332.75,1316.37) U3.G1@2355.02,1316.37
CTL3: U3.F1 U10.H7 | length 44.5
  Top Layer w6: U10.H7@1432.99,1599.5 v1(1448.74,1615.24) ; v1(2310.48,1338.64) U3.F1@2332.75,1338.64
CTL4: U3.E1 U10.G7 | length 44.5
  Top Layer w6: U10.G7@1401.5,1599.5 v1(1417.24,1615.24) ; v1(2288.21,1360.92) U3.E1@2310.48,1360.92
CTL5: U3.G6 U10.G6 | length 44.5
  Top Layer w6: U10.G6@1401.5,1568 v1(1417.24,1552.25) ; v1(2444.1,1427.73) U3.G6@2466.37,1427.73
CTL6: U3.F6 U10.K6 | length 22.3
  Top Layer w6: U10.K6@1495.98,1568 v1(1511.73,1552.25)
CTL7: U3.G4 U10.H8 | length 44.5
  Top Layer w6: U10.H8@1432.99,1630.99 v1(1448.74,1646.74) ; v1(2399.56,1383.19) U3.G4@2421.83,1383.19
CTL8: U3.G3 U10.G5 | length 44.5
  Top Layer w6: U10.G5@1401.5,1536.5 v1(1417.24,1520.76) ; v1(2377.29,1360.92) U3.G3@2399.56,1360.92
CTL9: U3.J4 U10.H6 | length 44.5
  Top Layer w6: U10.H6@1432.99,1568 v1(1448.74,1552.25) ; v1(2444.1,1338.64) U3.J4@2466.37,1338.64
CTL10: U3.H4 U10.K5 | length 44.5
  Top Layer w6: U10.K5@1495.98,1536.5 v1(1511.73,1520.76) ; v1(2421.83,1360.92) U3.H4@2444.1,1360.92
CTL11: U3.J3 U10.J5 | length 44.5
  Top Layer w6: U10.J5@1464.49,1536.5 v1(1480.24,1520.76) ; v1(2421.83,1316.37) U3.J3@2444.1,1316.37
CTL12: U3.J2 U10.H5 | length 44.5
  Top Layer w6: U10.H5@1432.99,1536.5 v1(1448.74,1520.76) ; v1(2399.56,1294.1) U3.J2@2421.83,1294.1
DDR1V35: C1.1 C4.1 C5.1 C6.1 C7.1 C8.1 C9.1 C10.1 C11.1 C12.1 C13.1 C14.1 C15.1 C16.1 C17.1 C18.1 C19.1 C20.1 C21.1 C22.1 C61.1 C62.1 C63.1 C64.1 C65.1 C66.1 C67.1 C68.1 C69.1 C70.1 C71.1 C72.1 C73.1 R1.2 R54.2 R82.2 U1.A1 U1.A8 U1.B2 U1.C1 U1.C9 U1.D2 U1.D9 U1.E9 U1.F1 U1.G7 U1.H2 U1.H9 U1.K2 U1.K8 U1.N1 U1.N9 U1.R1 U1.R9 U3.A17 U3.C13 U3.D16 U3.G15 U3.H18 U3.K14 | length 540.9
  Top Layer w10: v1(2378,2263) U1.A1@2394,2279 ; v1(2378,2515) U1.A8@2394,2499 ; v1(2409,2294) U1.B2@2425,2310 ; v1(2440,2263) U1.C1@2456,2279 ; v1(2441,2547) U1.C9@2457,2531 ; v1(2472,2294) U1.D2@2488,2310 ; v1(2473,2547) U1.D9@2489,2531 ; v1(2504,2547) U1.E9@2520,2531 ; U3.C13@2533.19,1672.71 v1(2533.19,1694.98) ; v1(2535,2263) U1.F1@2551,2279 ; v1(2567,2484) U1.G7@2583,2468 ; U3.A17@2577.73,1806.34 v1(2577.73,1828.61) ; v1(2598,2294) U1.H2@2614,2310 ; v1(2598,2547) U1.H9@2614,2531 ; U3.D16@2622.27,1717.25 v1(2622.27,1739.52) ; U3.G15@2666.81,1628.17 v1(2666.81,1650.44) ; U1.K2@2677,2310 v1(2693,2294) ; U1.K8@2677,2499 v1(2693,2515) ; U3.K14@2711.36,1539.08 v1(2733.63,1539.08) ; U3.H18@2755.9,1672.71 v1(2755.9,1694.98) ; U1.N9@2771,2531 v1(2787,2547) ; U1.N1@2772,2279 v1(2788,2263) ; U1.R1@2835,2279 v1(2851,2263) ; U1.R9@2835,2531 v1(2851,2547)
DDR3_A0: U1.N3 U3.G14 | length 44.9
  Top Layer w6: U3.G14@2644.54,1605.9 v1(2644.54,1628.17) ; U1.N3@2772,2342 v1(2788,2326)
DDR3_A1: U1.P7 U3.H17 | length 44.9
  Top Layer w6: U3.H17@2733.63,1650.44 v1(2733.63,1672.71) ; U1.P7@2803,2467 v1(2819,2483)
DDR3_A2: U1.P3 U3.D17 | length 44.9
  Top Layer w6: U3.D17@2644.54,1739.52 v1(2644.54,1761.79) ; U1.P3@2803,2342 v1(2819,2326)
DDR3_A3: U1.N2 U3.J13 | length 44.9
  Top Layer w6: U3.J13@2666.81,1539.08 v1(2666.81,1561.36) ; U1.N2@2772,2310 v1(2788,2294)
DDR3_A4: U1.P8 U3.G17 | length 44.9
  Top Layer w6: U3.G17@2711.36,1672.71 v1(2711.36,1694.98) ; U1.P8@2803,2499 v1(2819,2515)
DDR3_A5: U1.P2 U3.J17 | length 44.9
  Top Layer w6: U3.J17@2755.9,1628.17 v1(2755.9,1650.44) ; U1.P2@2804,2310 v1(2820,2294)
DDR3_A6: U1.R8 U3.C17 | length 44.9
  Top Layer w6: U3.C17@2622.27,1761.8 v1(2622.27,1784.07) ; U1.R8@2834,2499 v1(2850,2515)
DDR3_A7: U1.R2 U3.G18 | length 44.9
  Top Layer w6: U3.G18@2733.63,1694.98 v1(2733.63,1717.25) ; U1.R2@2835,2310 v1(2851,2294)
DDR3_A8: U1.T8 U3.K15 | length 44.9
  Top Layer w6: U3.K15@2733.63,1561.36 v1(2755.9,1561.36) ; U1.T8@2866,2499 v1(2882,2515)
DDR3_A9: U1.R3 U3.C16 | length 44.9
  Top Layer w6: U3.C16@2600,1739.52 v1(2600,1761.79) ; U1.R3@2835,2342 v1(2851,2326)
DDR3_A10: U1.L7 U3.J14 | length 44.9
  Top Layer w6: U3.J14@2689.08,1561.36 v1(2689.08,1583.63) ; U1.L7@2709,2467 v1(2725,2483)
DDR3_A11: U1.R7 U3.F18 | length 44.9
  Top Layer w6: U3.F18@2711.36,1717.25 v1(2711.36,1739.52) ; U1.R7@2834,2467 v1(2850,2483)
DDR3_A12: U1.N7 U3.J18 | length 44.9
  Top Layer w6: U1.N7@2771,2467 v1(2787,2483) ; U3.J18@2778.17,1650.44 v1(2778.17,1672.71)
DDR3_A13: U1.T3 U3.J15 | length 44.9
  Top Layer w6: U3.J15@2711.36,1583.63 v1(2711.36,1605.9) ; U1.T3@2866,2342 v1(2882,2326)
DDR3_BA0: U1.M2 U3.K13 | length 44.9
  Top Layer w6: U3.K13@2689.08,1516.81 v1(2711.36,1516.81) ; U1.M2@2740,2310 v1(2756,2294)
DDR3_BA1: U1.N8 U3.F15 | length 44.9
  Top Layer w6: U3.F15@2644.54,1650.44 v1(2644.54,1672.71) ; U1.N8@2771,2499 v1(2787,2515)
DDR3_BA2: U1.M3 U3.H14 | length 44.9
  Top Layer w6: U3.H14@2666.81,1583.63 v1(2666.81,1605.9) ; U1.M3@2740,2342 v1(2756,2326)
DDR3_CAS: U1.K3 U3.E17 | length 44.9
  Top Layer w6: U3.E17@2666.81,1717.25 v1(2666.81,1739.52) ; U1.K3@2677,2341 v1(2693,2325)
DDR3_CKE0: U1.K9 U3.H16 | length 44.9
  Top Layer w6: U1.K9@2677,2531 v1(2693,2547) ; U3.H16@2711.36,1628.17 v1(2711.36,1650.44)
DDR3_CLK0_N: R3.2 U1.K7 U3.D18 | length 44.9
  Top Layer w6: U3.D18@2666.81,1761.8 v1(2666.81,1784.07) ; U1.K7@2678,2467 v1(2694,2483)
DDR3_CLK0_P: R3.1 U1.J7 U3.E18 | length 44.9
  Top Layer w6: U1.J7@2645,2467 v1(2661,2483) ; U3.E18@2689.08,1739.52 v1(2689.08,1761.79)
DDR3_CS: U1.L2 U3.K16 | length 44.9
  Top Layer w6: U1.L2@2709,2310 v1(2725,2294) ; U3.K16@2755.9,1583.63 v1(2778.17,1583.63)
DDR3_DM0: U1.E7 U3.D14 | length 44.9
  Top Layer w6: v1(2505,2483) U1.E7@2521,2467 ; U3.D14@2577.73,1672.71 v1(2577.73,1694.98)
DDR3_DM1: U1.D3 U3.B16 | length 44.9
  Top Layer w6: v1(2473,2325) U1.D3@2489,2341 ; U3.B16@2577.73,1761.8 v1(2577.73,1784.07)
DDR3_DQ0: U1.E3 U3.F13 | length 44.9
  Top Layer w6: v1(2504,2325) U1.E3@2520,2341 ; U3.F13@2600,1605.9 v1(2600,1628.17)
DDR3_DQ1: U1.F7 U3.B14 | length 44.9
  Top Layer w6: U3.B14@2533.19,1717.25 v1(2533.19,1739.52) ; v1(2536,2483) U1.F7@2552,2467
DDR3_DQ2: U1.F2 U3.B13 | length 44.9
  Top Layer w6: U3.B13@2510.92,1694.98 v1(2510.92,1717.25) ; v1(2536,2294) U1.F2@2552,2310
DDR3_DQ3: U1.F8 U3.D12 | length 44.9
  Top Layer w6: U3.D12@2533.19,1628.17 v1(2533.19,1650.44) ; v1(2536,2515) U1.F8@2552,2499
DDR3_DQ4: U1.H3 U3.B11 | length 44.9
  Top Layer w6: U3.B11@2466.37,1650.44 v1(2466.37,1672.71) ; v1(2598,2326) U1.H3@2614,2342
DDR3_DQ5: U1.H8 U3.C14 | length 44.9
  Top Layer w6: U3.C14@2555.46,1694.98 v1(2555.46,1717.25) ; v1(2599,2515) U1.H8@2615,2499
DDR3_DQ6: U1.G2 U3.F14 | length 44.9
  Top Layer w6: v1(2567,2294) U1.G2@2583,2310 ; U3.F14@2622.27,1628.17 v1(2622.27,1650.44)
DDR3_DQ7: U1.H7 U3.A11 | length 44.9
  Top Layer w6: U3.A11@2444.1,1672.71 v1(2444.1,1694.98) ; v1(2599,2483) U1.H7@2615,2467
DDR3_DQ8: U1.D7 U3.A18 | length 44.9
  Top Layer w6: v1(2473,2483) U1.D7@2489,2467 ; U3.A18@2600,1828.61 v1(2600,1850.88)
DDR3_DQ9: U1.C3 U3.D15 | length 44.9
  Top Layer w6: v1(2441,2325) U1.C3@2457,2341 ; U3.D15@2600,1694.98 v1(2600,1717.25)
DDR3_DQ10: U1.C8 U3.A15 | length 44.9
  Top Layer w6: v1(2441,2515) U1.C8@2457,2499 ; U3.A15@2533.19,1761.8 v1(2533.19,1784.07)
DDR3_DQ11: U1.C2 U3.B18 | length 44.9
  Top Layer w6: v1(2441,2294) U1.C2@2457,2310 ; U3.B18@2622.27,1806.34 v1(2622.27,1828.61)
DDR3_DQ12: U1.A7 U3.B17 | length 44.9
  Top Layer w6: v1(2378,2483) U1.A7@2394,2467 ; U3.B17@2600,1784.07 v1(2600,1806.34)
DDR3_DQ13: U1.A2 U3.E16 | length 44.9
  Top Layer w6: v1(2378,2294) U1.A2@2394,2310 ; U3.E16@2644.54,1694.98 v1(2644.54,1717.25)